# EAGLE board A1000_Board_04 (EAGLE 3.55), part 1 of 8
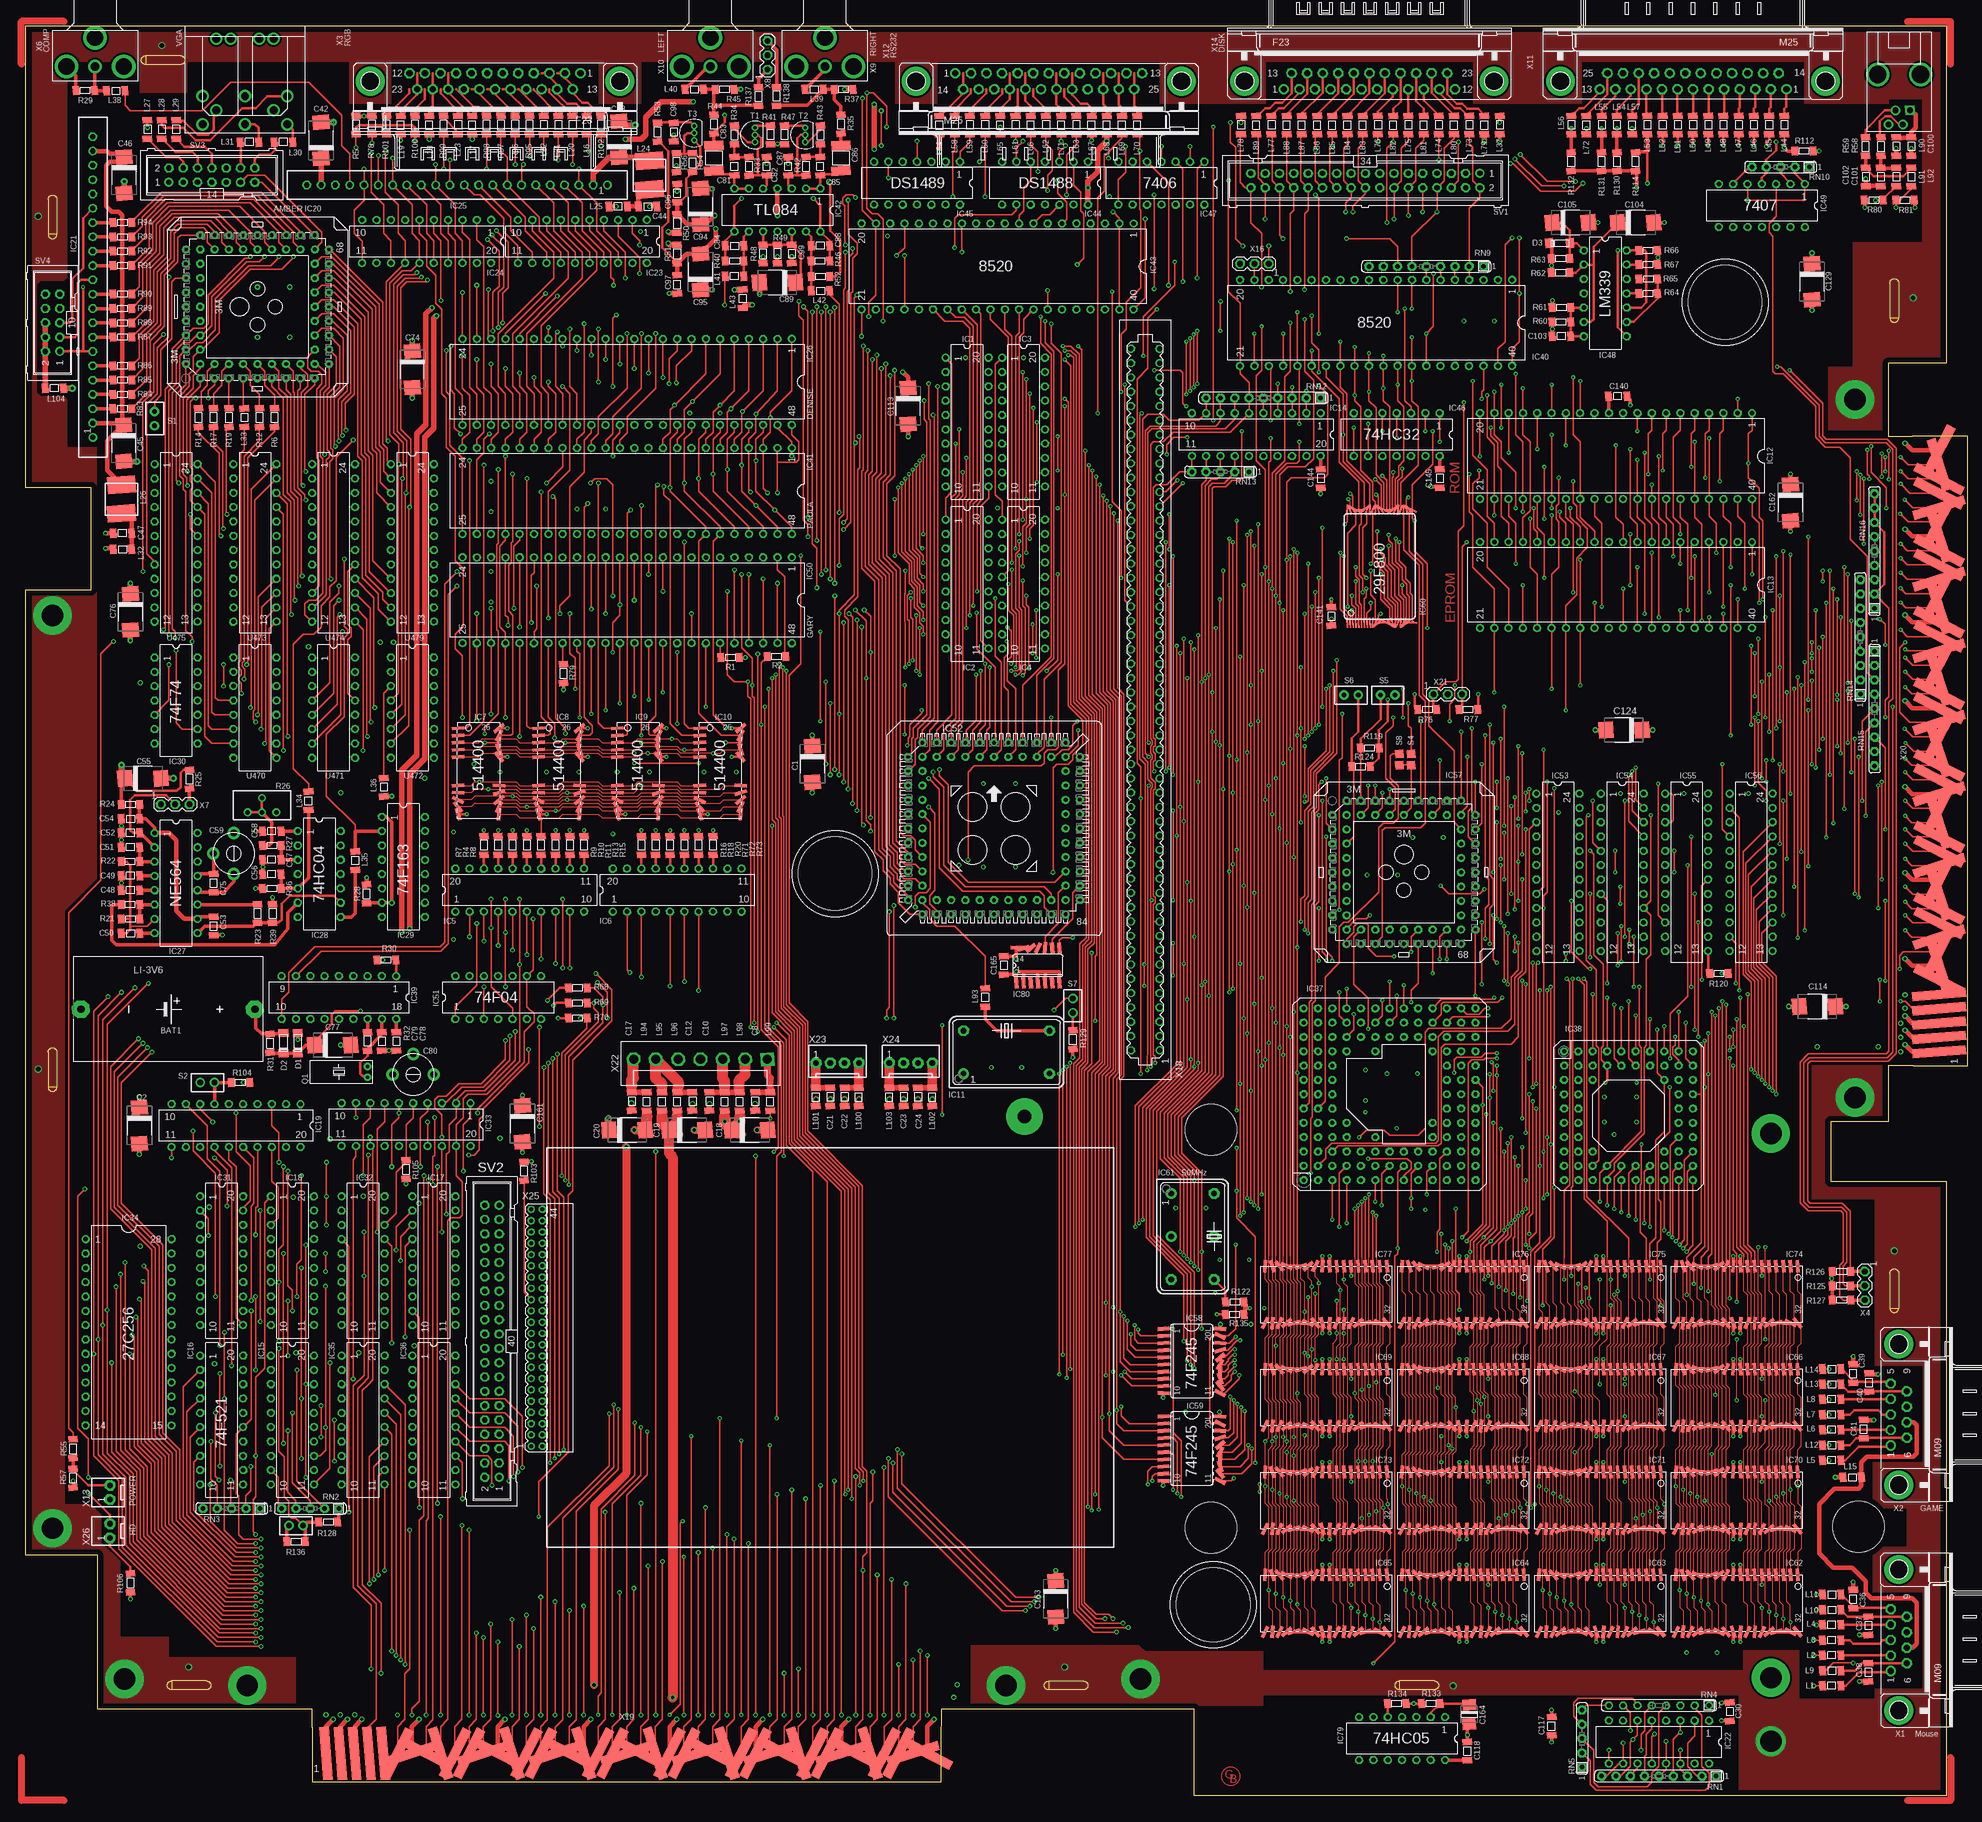
[diagram p0: board, top side]
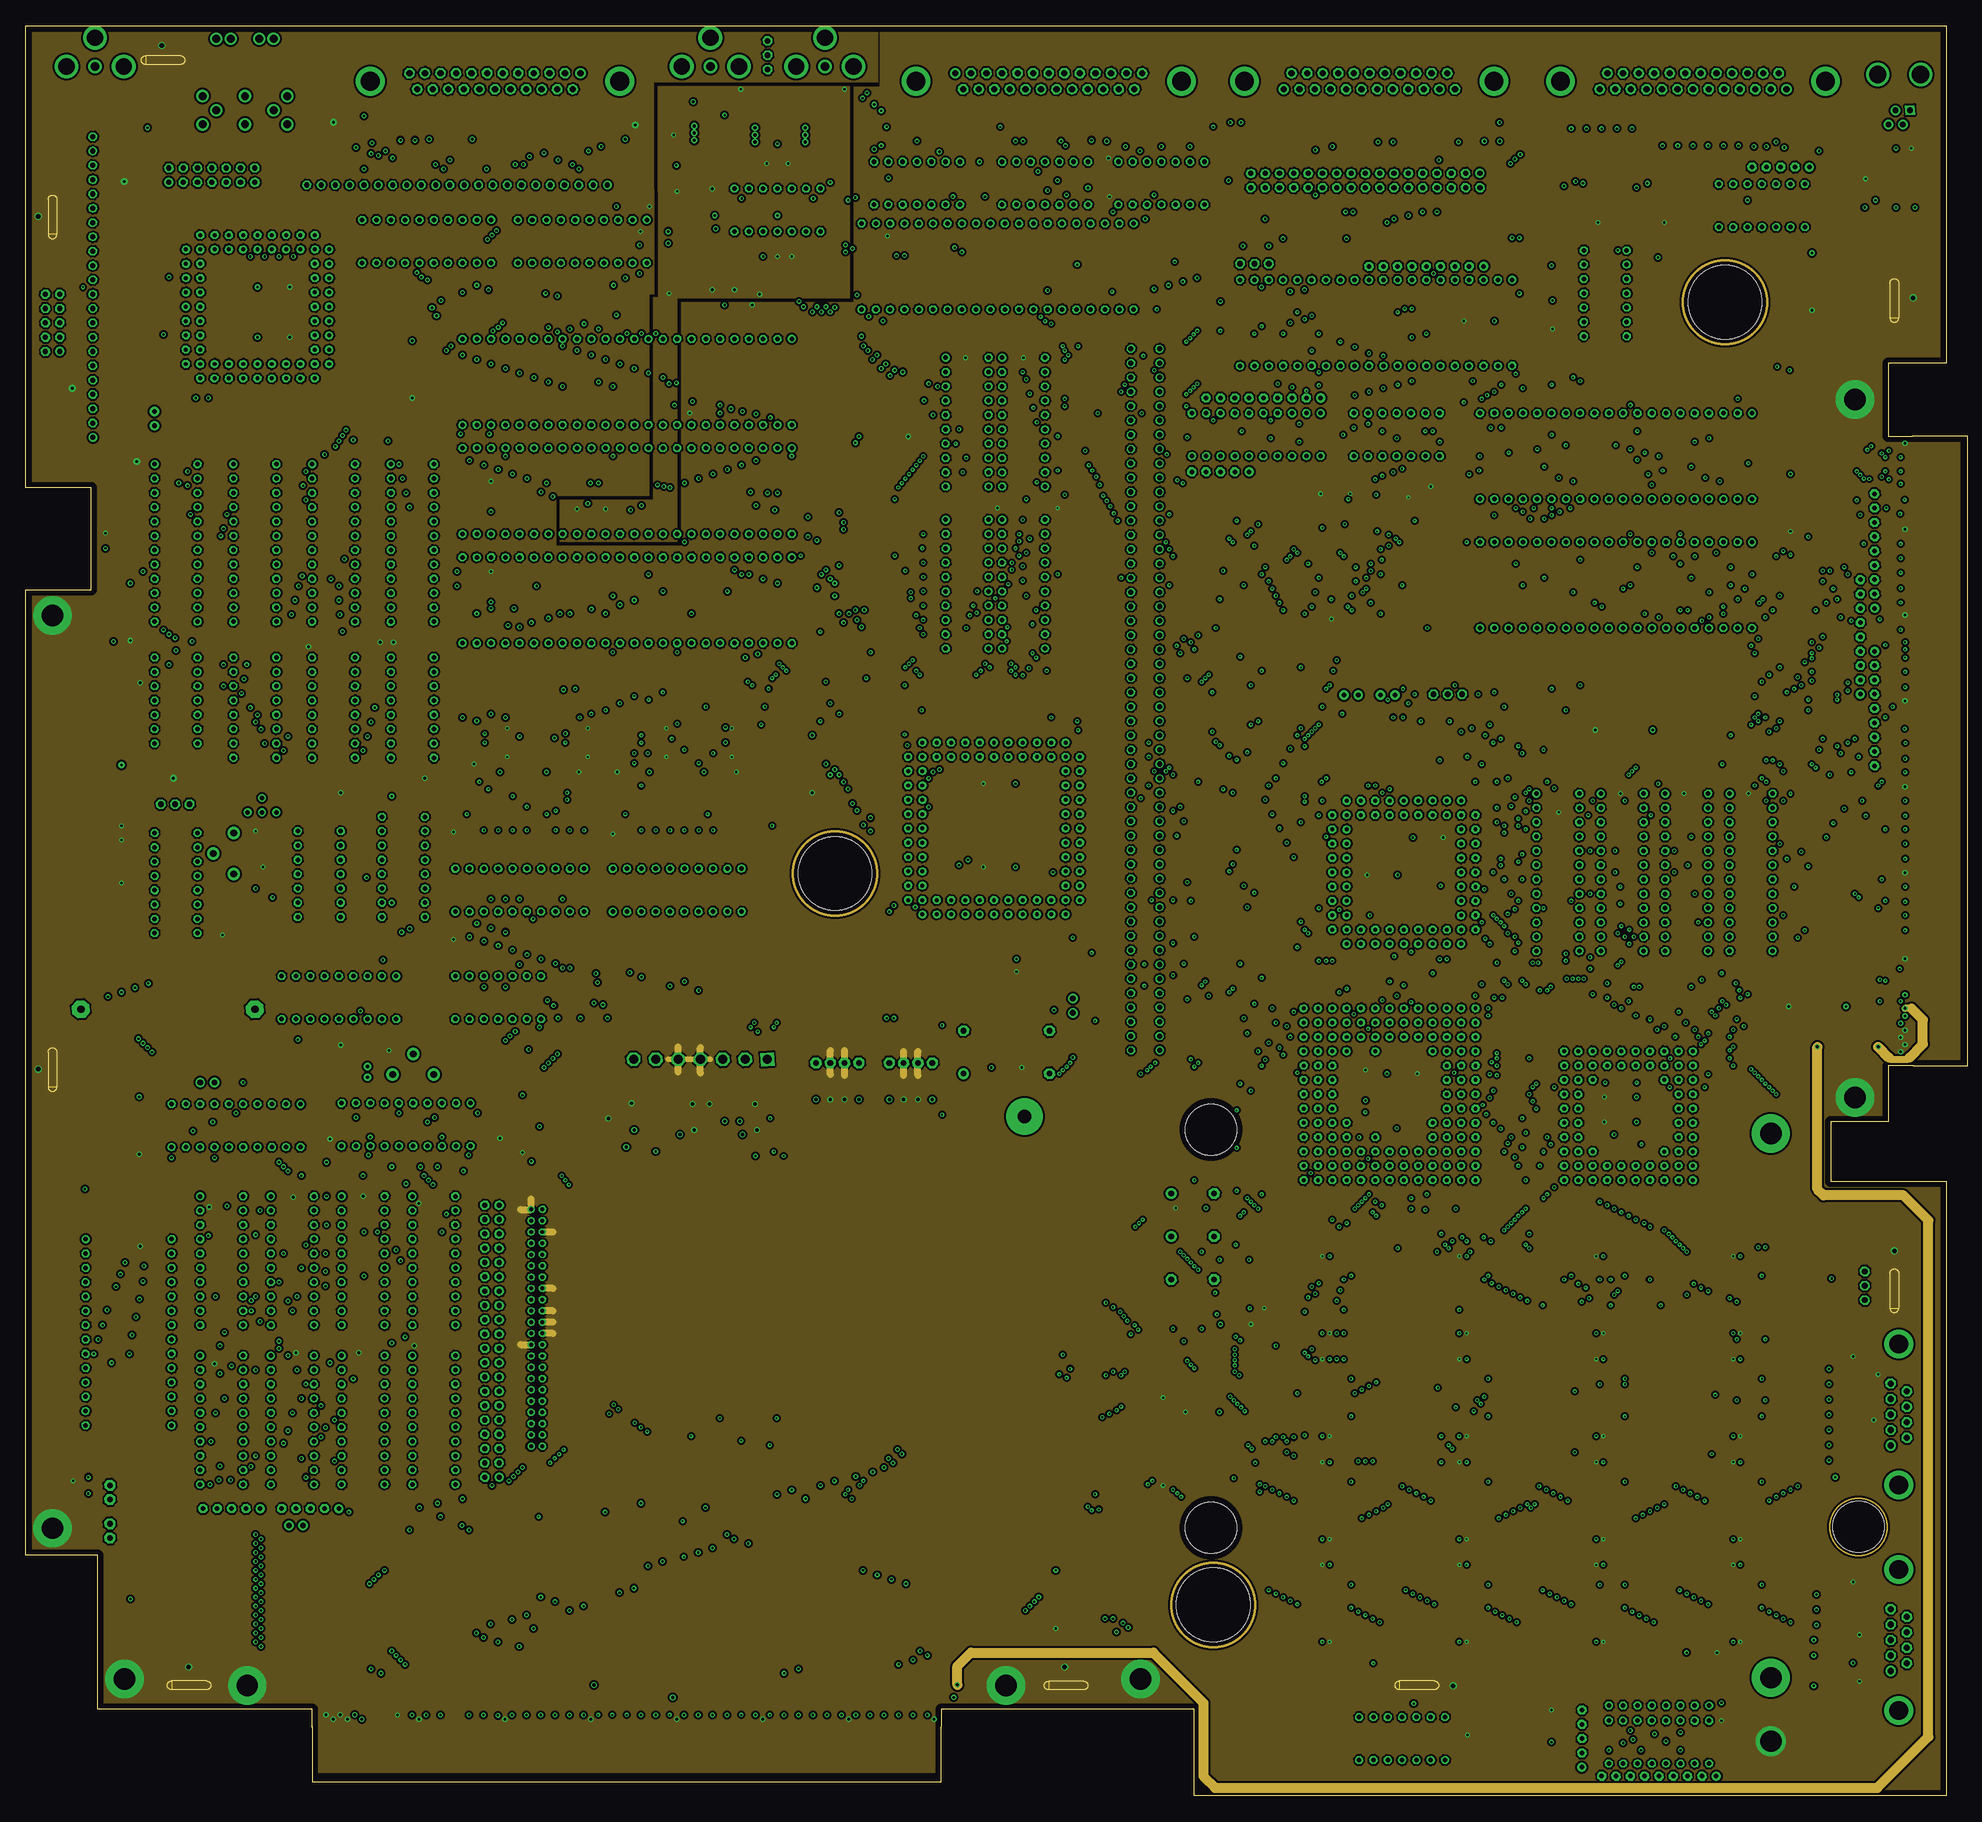
[diagram p1: board, inner layer Route2]
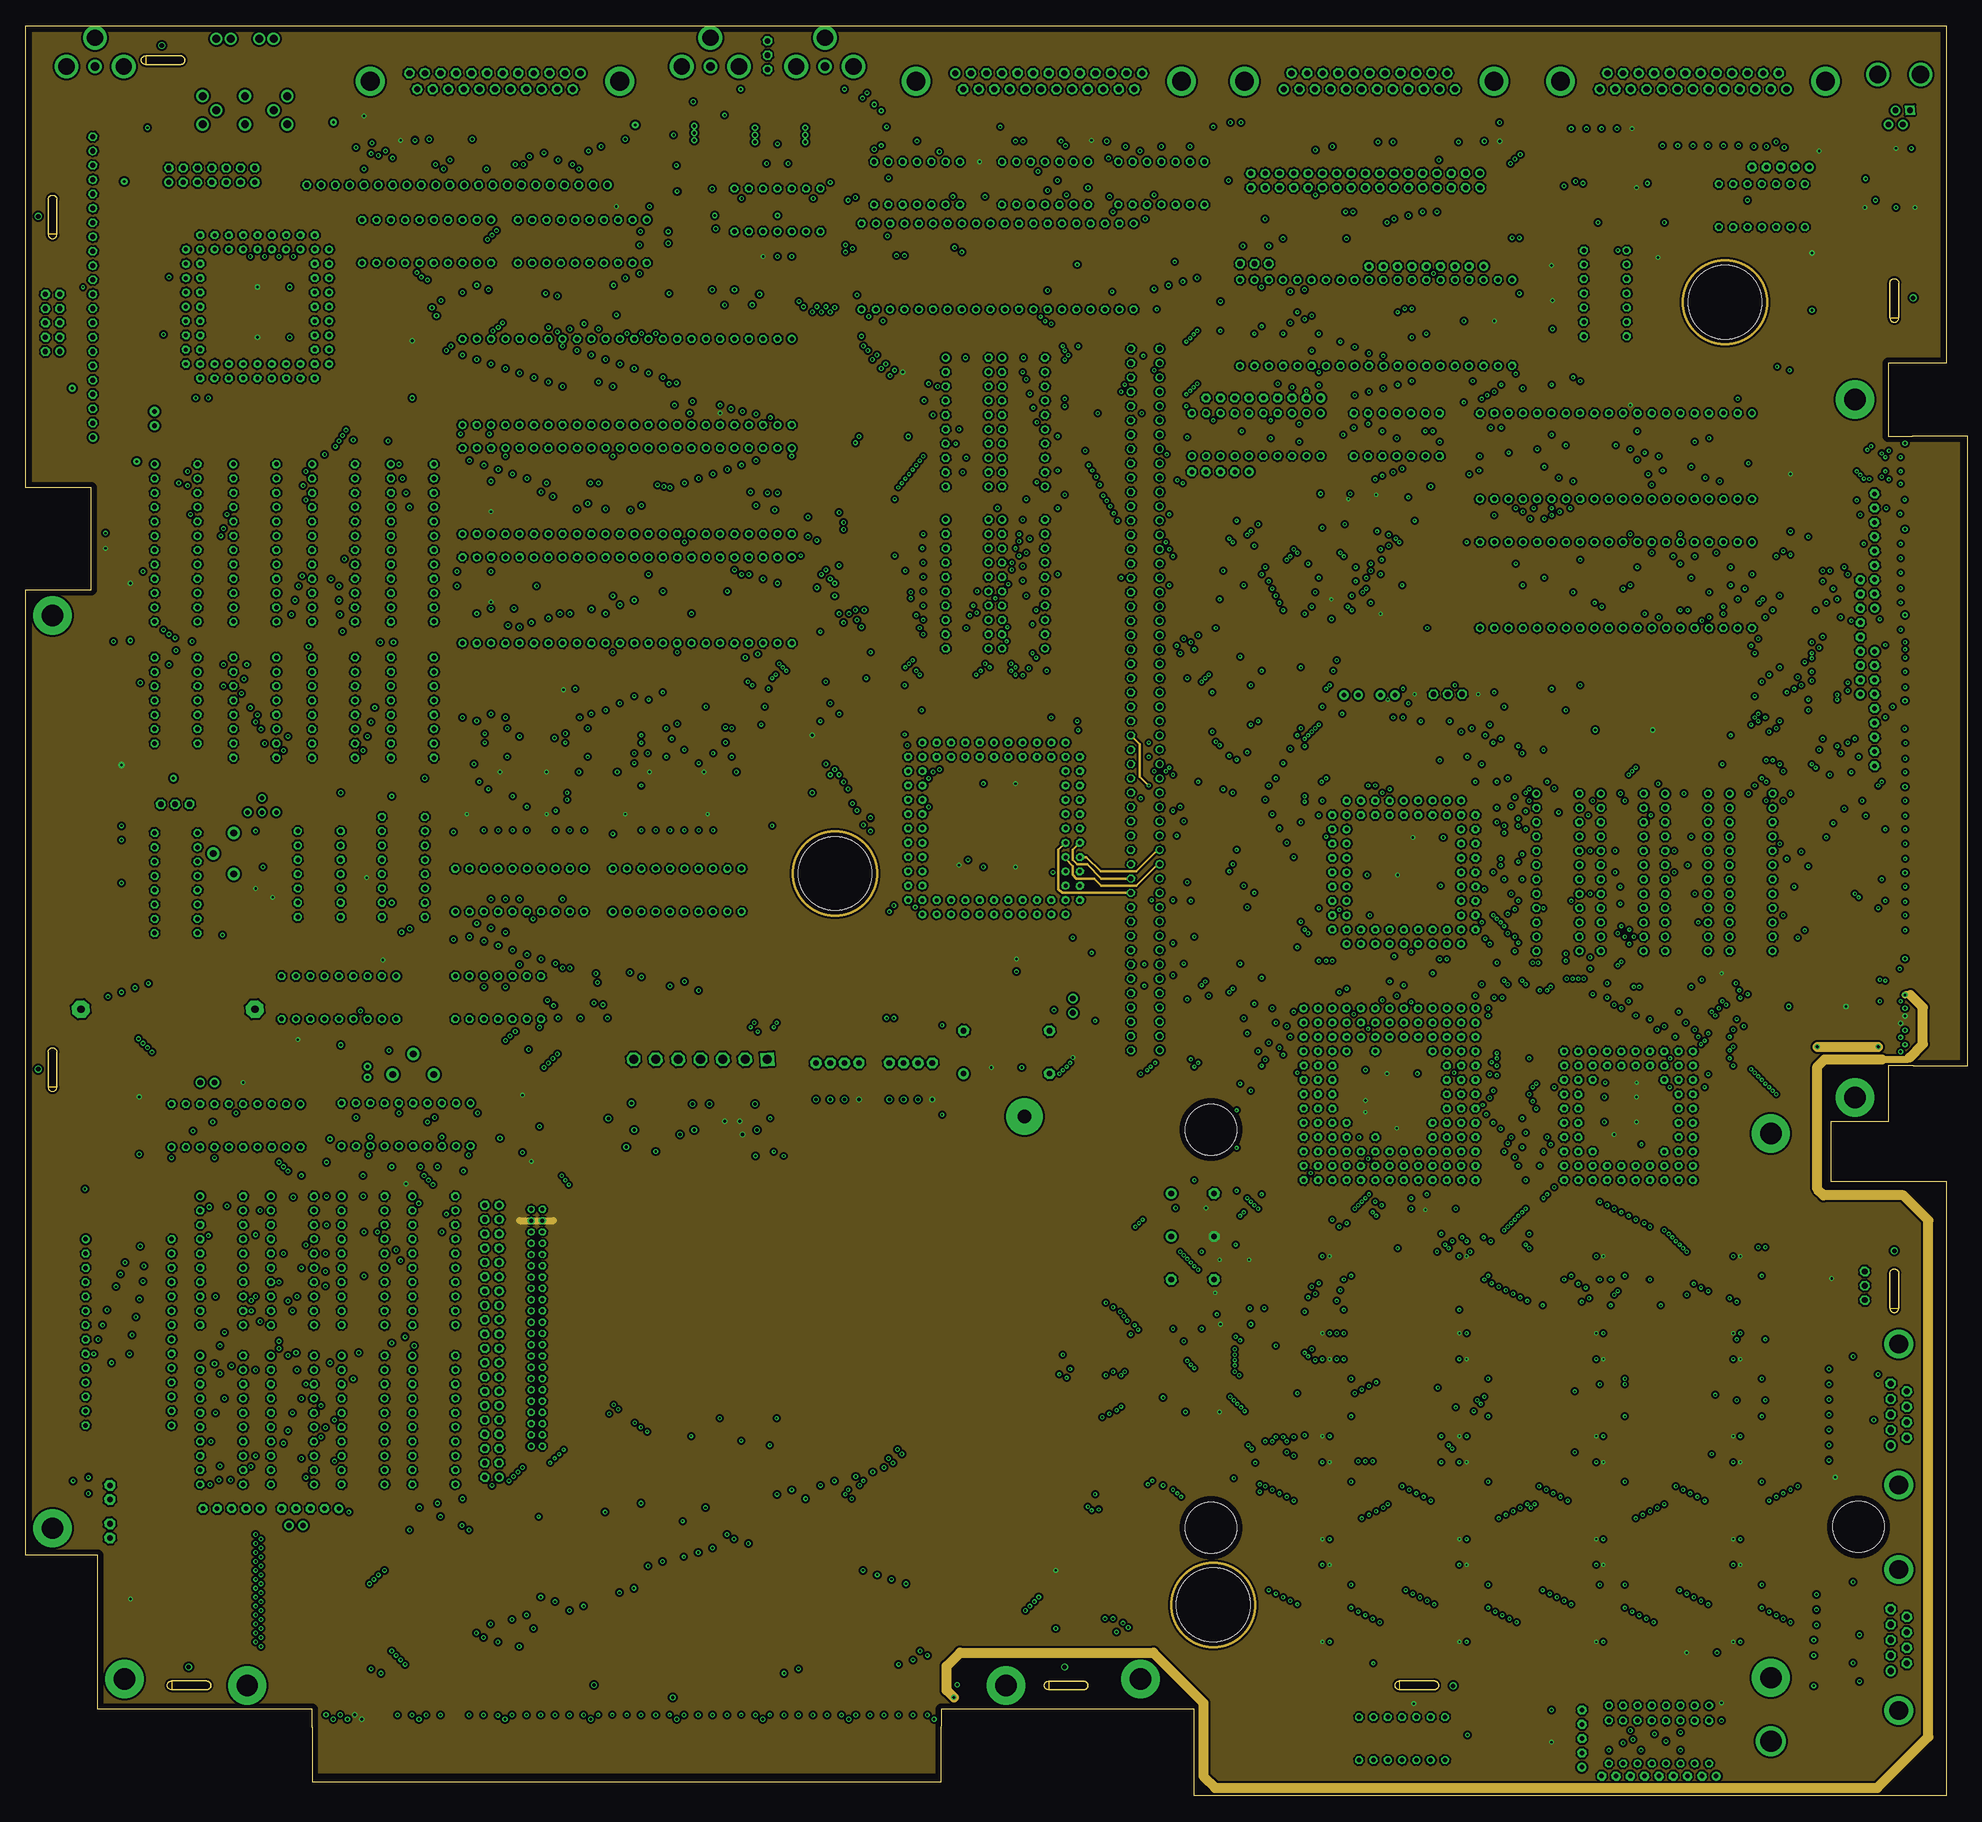
[diagram p2: board, inner layer Route3]
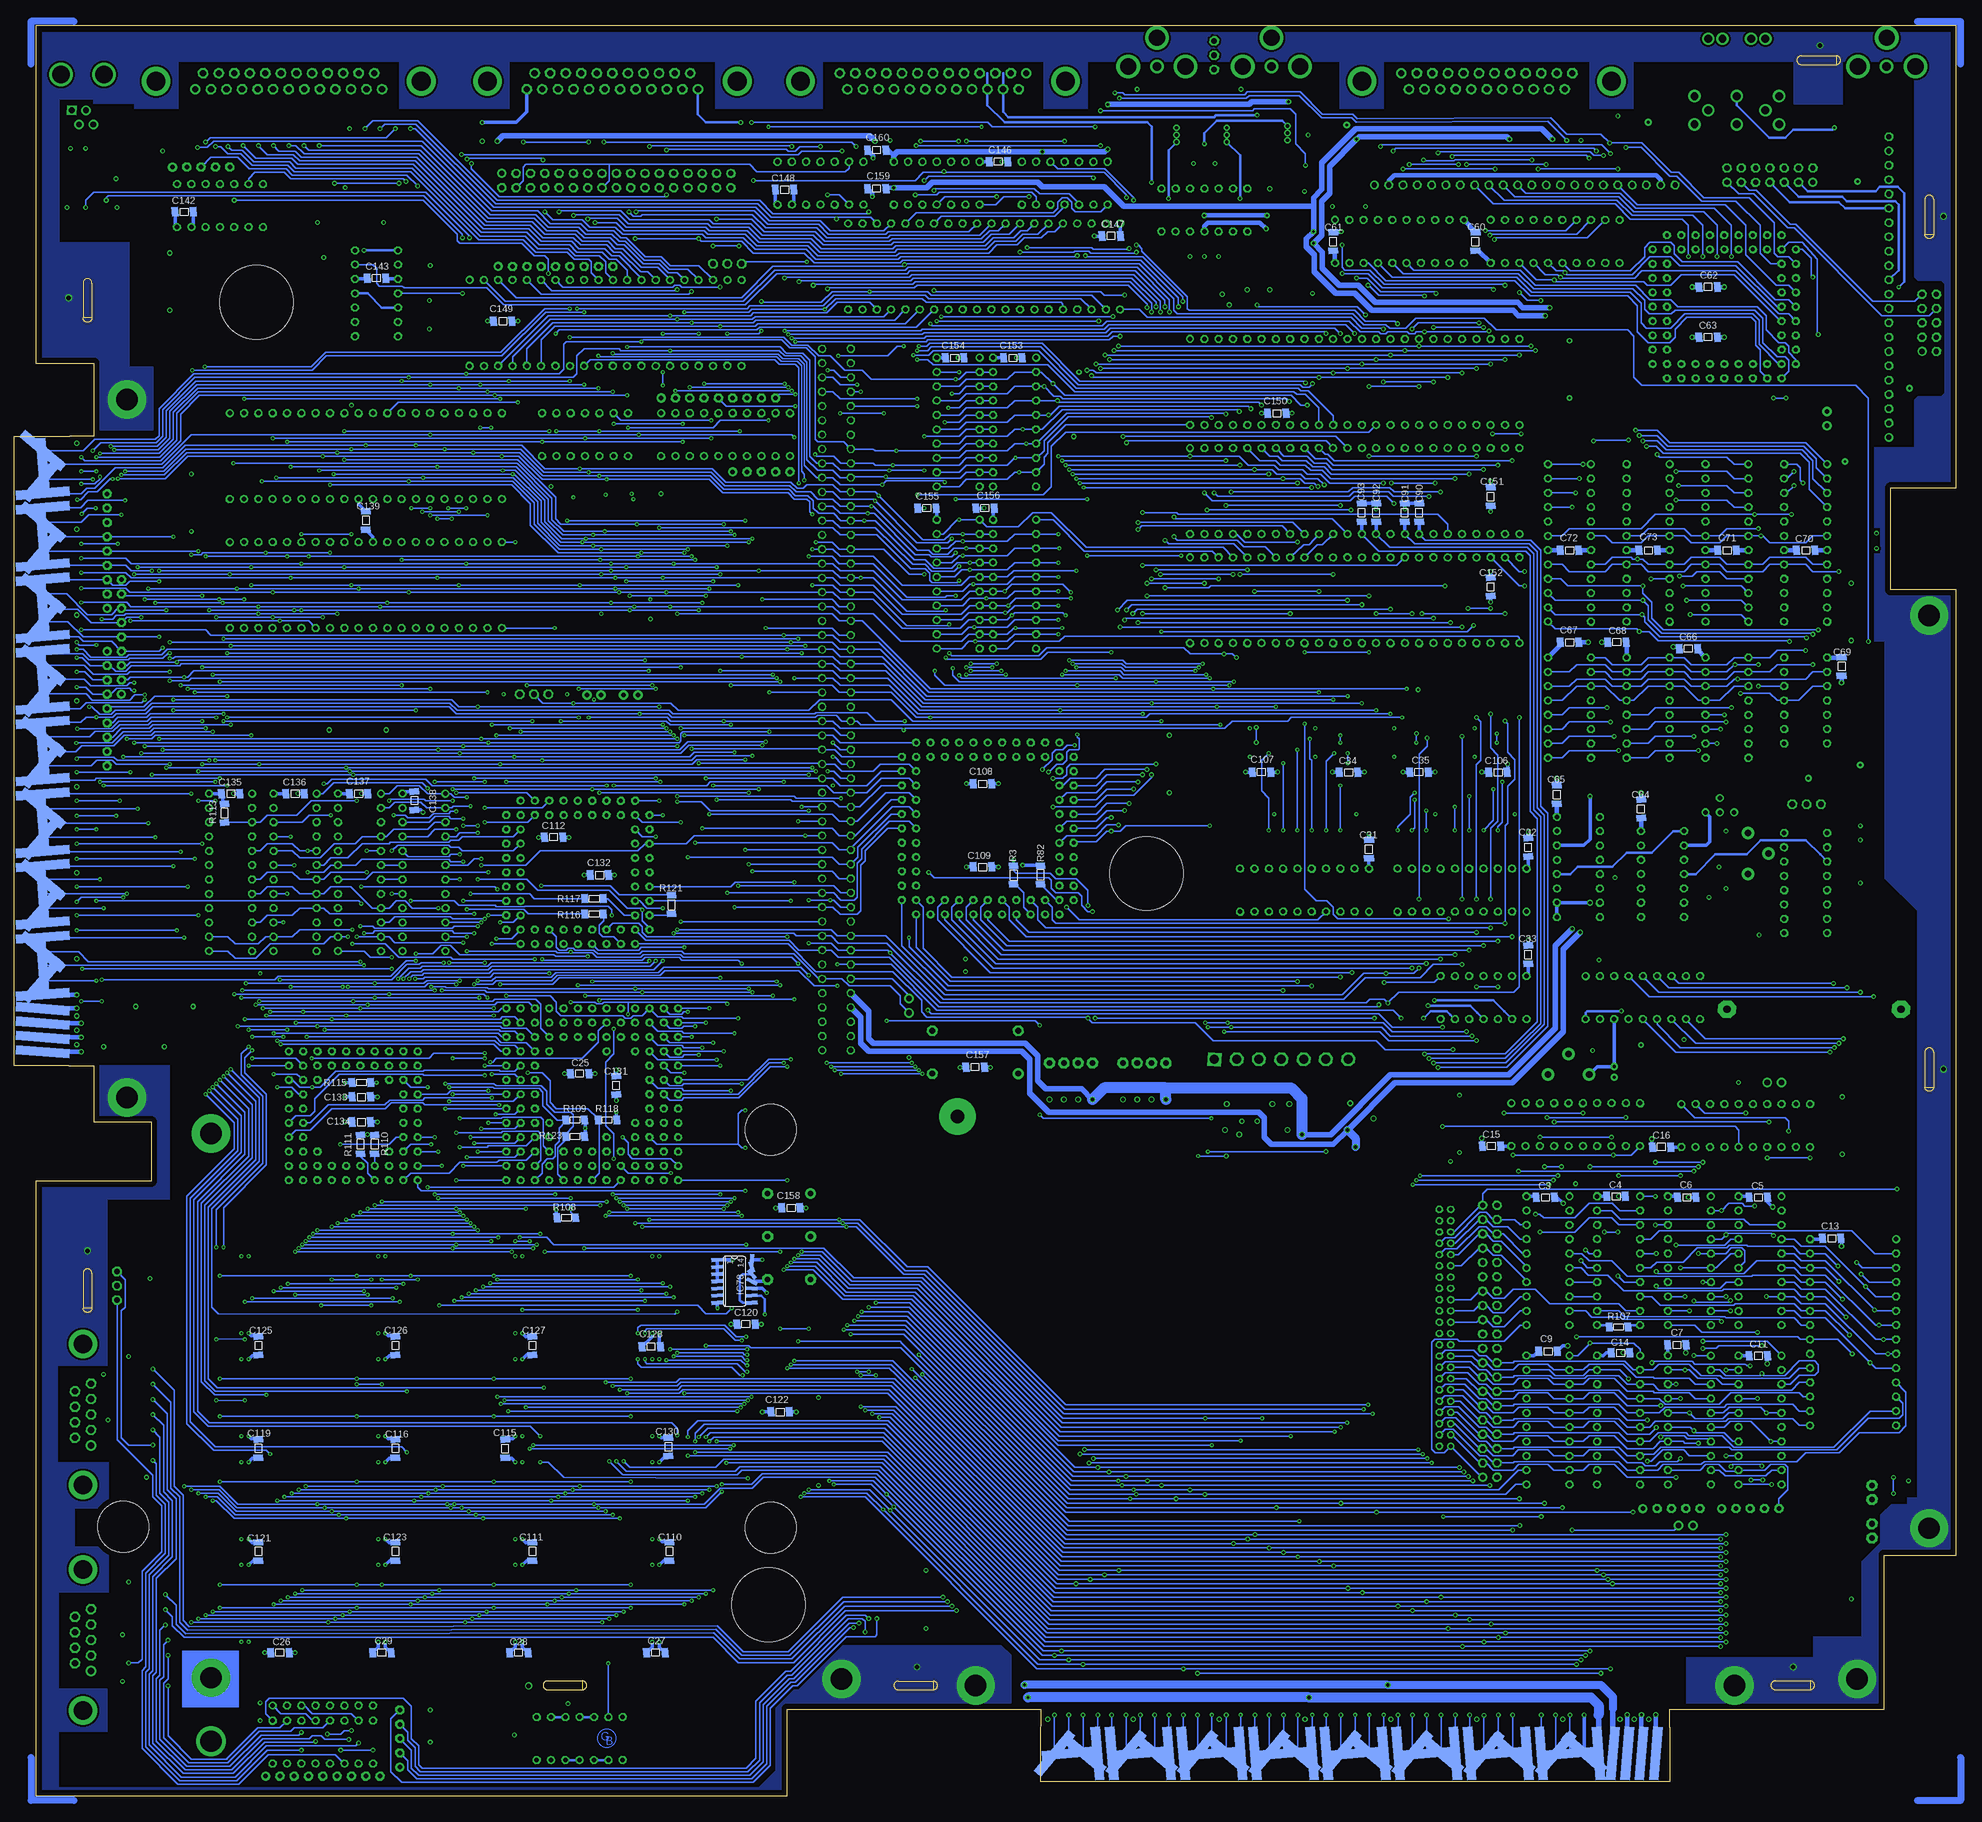
[diagram p3: board, bottom side, seen from below]

Size 344.49 x 314.01 mm. Coordinates in mm from the lower left corner, seen from the top.
Outline: 162.4,12.38 162.4,15.4 207.33,15.4 207.33,0 340.68,0 340.68,109.06 320.2,109.06 320.2,119.54 330.36,119.54 330.36,129.54 334.8,129.54
Outline: 50.8,12.14 50.8,15.4 12.78,15.4 12.78,36.04 12.78,36.04 12.78,42.7 0,42.7 0,157 0,164.31 0,195.1 0,200.98 0,214 11.59,214 11.59,232.09 0,232.09 0,314.01 340.68,314.01 340.68,254.16 330.36,254.16 330.36,241.14 334.65,241.14
Copper layers used: Top, Route2, Route3, Bottom
Holes 9.1 mm at 210.26,47.55 210.26,118.19 325.12,47.7
Holes 13.1 mm at 301.47,264.95 143.59,163.59 210.66,33.89
tRestrict: area 320,42.6 to 330.2,52.8
Milling: 32 lines

## Footprints (pad centres in the part's own frame; a part is rotated, then mirrored left to right if it is on the bottom)
-3V6 = drill 1.321 pad 3.15 octagon:  -15.24,0;  15.621,0
43 = smd 2.6 x 2.9 rotated 4.4:  3.207,0 | smd 2.6 x 2.9 rotated 4.3:  -3.207,0
06 = smd 1.143 x 1.702 rotated 4.4:  1.632,0 | smd 1.143 x 1.702 rotated 4.3:  -1.632,0
TRIM-1 = drill 1.2 pad 2.184 round:  -3.651,0;  3.651,0;  0,3.651
12 = smd 1.71 x 3.4 rotated 4.4:  2.235,0 | smd 1.71 x 3.4 rotated 4.3:  -2.235,0
28 = smd 2.007 x 2.388 rotated 4.4:  1.702,0 | smd 2.007 x 2.388 rotated 4.3:  -1.702,0
D-80 = smd 1.429 x 1.746 rotated 4.4:  -1.832,0 | smd 1.429 x 1.746 rotated 4.3:  1.826,-0.002
P20 = drill 0.8 pad 1.4 round:  -11.43,-3.81 | drill 0.8 pad 1.4 octagon:  -8.89,-3.81;  -6.35,-3.81;  -3.81,-3.81;  -1.27,-3.81;  1.27,-3.81;  3.81,-3.81;  6.35,-3.81;  8.89,-3.81;  11.43,-3.81;  11.43,3.81;  8.89,3.81;  6.35,3.81;  3.81,3.81;  1.27,3.81;  -1.27,3.81;  -3.81,3.81;  -6.35,3.81;  -8.89,3.81;  -11.43,3.81
J26/20 = smd 0.6 x 2.2 rotated 139.4:  -6.35,3.632 | smd 0.6 x 2.2 rotated 116.9:  -5.08,3.632 | smd 0.6 x 2.2 rotated 94.4:  -3.81,3.632 | smd 0.6 x 2.2 rotated 71.9:  -2.54,3.632 | smd 0.6 x 2.2 rotated 49.4:  -1.27,3.632 | smd 0.6 x 2.2 rotated 116.8:  7.62,3.632 | smd 0.6 x 2.2 rotated 139.3:  6.35,3.632 | smd 0.6 x 2.2 rotated 161.8:  5.08,3.632 | smd 0.6 x 2.2 rotated 184.3:  3.81,3.632 | smd 0.6 x 2.2 rotated 49.3:  7.62,-3.632 | smd 0.6 x 2.2 rotated 26.8:  6.35,-3.632 | smd 0.6 x 2.2 rotated 4.3:  5.08,-3.632;  -6.35,-3.632 | smd 0.6 x 2.2 rotated 5:  3.81,-3.632 | smd 0.6 x 2.2 rotated 4.7:  -1.27,-3.632 | smd 0.6 x 2.2 rotated 4.6:  -2.54,-3.632 | smd 0.6 x 2.2 rotated 4.5:  -3.81,-3.632 | smd 0.6 x 2.2 rotated 4.4:  -5.08,-3.632 | smd 0.6 x 2.2 rotated 94.3:  8.89,3.632 | smd 0.6 x 2.2 rotated 71.8:  8.89,-3.632
DIL14 = drill 1 pad 1.905 round:  -7.62,-3.81 | drill 1 pad 1.905 octagon:  7.62,-3.81;  7.62,3.81;  -7.62,3.81
P40-6 = drill 0.8 pad 1.4 round:  -24.13,-7.62 | drill 0.8 pad 1.4 octagon:  -21.59,-7.62;  -19.05,-7.62;  -16.51,-7.62;  -13.97,-7.62;  -11.43,-7.62;  -8.89,-7.62;  -6.35,-7.62;  -3.81,-7.62;  -1.27,-7.62;  1.27,-7.62;  3.81,-7.62;  6.35,-7.62;  8.89,-7.62;  11.43,-7.62;  13.97,-7.62;  16.51,-7.62;  19.05,-7.62;  21.59,-7.62;  24.13,-7.62;  24.13,7.62;  21.59,7.62;  19.05,7.62;  16.51,7.62;  13.97,7.62;  11.43,7.62;  8.89,7.62;  6.35,7.62;  3.81,7.62;  1.27,7.62;  -1.27,7.62;  -3.81,7.62;  -6.35,7.62;  -8.89,7.62;  -11.43,7.62;  -13.97,7.62;  -16.51,7.62;  -19.05,7.62;  -21.59,7.62;  -24.13,7.62
CC68 = drill 0.7 pad 1.4 round:  0,12.7 | drill 0.7 pad 1.4 octagon:  0,10.16;  -2.54,12.7;  -2.54,10.16;  -5.08,12.7;  -5.08,10.16;  -7.62,12.7;  -7.62,10.16;  -10.16,12.7;  -12.7,10.16;  -10.16,10.16;  -12.7,7.62;  -10.16,7.62;  -12.7,5.08;  -10.16,5.08;  -12.7,2.54;  -10.16,2.54;  -12.7,0;  -10.16,0;  -12.7,-2.54;  -10.16,-2.54;  -12.7,-5.08;  -10.16,-5.08;  -12.7,-7.62;  -10.16,-7.62;  -12.7,-10.16;  -10.16,-12.7;  -10.16,-10.16;  -7.62,-12.7;  -7.62,-10.16;  -5.08,-12.7;  -5.08,-10.16;  -2.54,-12.7;  -2.54,-10.16;  0,-12.7;  0,-10.16;  2.54,-12.7;  2.54,-10.16;  5.08,-12.7;  5.08,-10.16;  7.62,-12.7;  7.62,-10.16;  10.16,-12.7;  12.7,-10.16;  10.16,-10.16;  12.7,-7.62;  10.16,-7.62;  12.7,-5.08;  10.16,-5.08;  12.7,-2.54;  10.16,-2.54;  12.7,0;  10.16,0;  12.7,2.54;  10.16,2.54;  12.7,5.08;  10.16,5.08;  12.7,7.62;  10.16,7.62;  12.7,10.16;  10.16,12.7;  10.16,10.16;  7.62,12.7;  7.62,10.16;  5.08,12.7;  5.08,10.16;  2.54,12.7;  2.54,10.16
P22 = drill 0.9 pad 1.5 round:  -26.67,0 | drill 0.9 pad 1.5 octagon:  -24.13,0;  -21.59,0;  -19.05,0;  -16.51,0;  -13.97,0;  -11.43,0;  -8.89,0;  -6.35,0;  -3.81,0;  -1.27,0;  1.27,0;  3.81,0;  6.35,0;  8.89,0;  11.43,0;  13.97,0;  16.51,0;  19.05,0;  21.59,0;  24.13,0;  26.67,0
P16 = drill 0.8 pad 1.4 octagon:  -8.89,-3.81;  -6.35,-3.81;  -3.81,-3.81;  -1.27,-3.81;  1.27,-3.81;  3.81,-3.81;  6.35,-3.81;  8.89,-3.81;  8.89,3.81;  6.35,3.81;  3.81,3.81;  1.27,3.81;  -1.27,3.81;  -3.81,3.81;  -6.35,3.81;  -8.89,3.81
P48-6 = drill 0.8 pad 1.4 round:  -27.94,-7.62 | drill 0.8 pad 1.4 octagon:  -25.4,-7.62;  -22.86,-7.62;  -20.32,-7.62;  -17.78,-7.62;  -15.24,-7.62;  -12.7,-7.62;  -10.16,-7.62;  -7.62,-7.62;  -5.08,-7.62;  -2.54,-7.62;  0,-7.62;  2.54,-7.62;  5.08,-7.62;  7.62,-7.62;  10.16,-7.62;  12.7,-7.62;  15.24,-7.62;  17.78,-7.62;  20.32,-7.62;  22.86,-7.62;  25.4,-7.62;  27.94,-7.62;  30.48,-7.62;  30.48,7.62;  27.94,7.62;  25.4,7.62;  22.86,7.62;  20.32,7.62;  17.78,7.62;  15.24,7.62;  12.7,7.62;  10.16,7.62;  7.62,7.62;  5.08,7.62;  2.54,7.62;  0,7.62;  -2.54,7.62;  -5.08,7.62;  -7.62,7.62;  -10.16,7.62;  -12.7,7.62;  -15.24,7.62;  -17.78,7.62;  -20.32,7.62;  -22.86,7.62;  -25.4,7.62;  -27.94,7.62
P14 = drill 0.8 pad 1.4 octagon:  -7.62,-3.81;  -5.08,-3.81;  -2.54,-3.81;  0,-3.81;  2.54,-3.81;  5.08,-3.81;  7.62,-3.81;  7.62,3.81;  5.08,3.81;  2.54,3.81;  0,3.81;  -2.54,3.81;  -5.08,3.81;  -7.62,3.81
P28-6 = drill 0.8 pad 1.4 round:  -16.51,-7.62 | drill 0.8 pad 1.4 octagon:  -13.97,-7.62;  -11.43,-7.62;  -8.89,-7.62;  -6.35,-7.62;  -3.81,-7.62;  -1.27,-7.62;  1.27,-7.62;  3.81,-7.62;  6.35,-7.62;  8.89,-7.62;  11.43,-7.62;  13.97,-7.62;  16.51,-7.62;  16.51,7.62;  13.97,7.62;  11.43,7.62;  8.89,7.62;  6.35,7.62;  3.81,7.62;  1.27,7.62;  -1.27,7.62;  -3.81,7.62;  -6.35,7.62;  -8.89,7.62;  -11.43,7.62;  -13.97,7.62;  -16.51,7.62
A-128 = drill 0.7 pad 1.4 octagon:  15.24,-15.24;  12.7,-15.24;  10.16,-15.24;  7.62,-15.24;  5.08,-15.24;  2.54,-15.24;  0,-15.24;  -2.54,-15.24;  -5.08,-15.24;  -7.62,-15.24;  -10.16,-15.24;  -12.7,-15.24;  -15.24,-15.24;  -15.24,-12.7;  15.24,12.7;  15.24,10.16;  15.24,7.62;  15.24,5.08;  15.24,2.54;  15.24,0;  15.24,-2.54;  15.24,-5.08;  15.24,-7.62;  15.24,-12.7;  12.7,-12.7;  10.16,-12.7;  7.62,-12.7;  5.08,-12.7;  2.54,-12.7;  0,-12.7;  -2.54,-12.7;  -5.08,-12.7;  -7.62,-12.7;  -10.16,-12.7;  -12.7,-12.7;  -15.24,-7.62;  -15.24,-5.08;  -15.24,-2.54;  -15.24,0;  -15.24,2.54;  -15.24,5.08;  -15.24,7.62;  -15.24,10.16;  -15.24,12.7;  12.7,12.7;  12.7,10.16;  12.7,7.62;  12.7,5.08;  12.7,2.54;  12.7,0;  12.7,-2.54;  12.7,-5.08;  12.7,-7.62;  12.7,15.24;  -15.24,15.24;  -12.7,15.24;  -10.16,15.24;  -7.62,15.24;  -5.08,15.24;  -2.54,15.24;  0,15.24;  2.54,15.24;  5.08,15.24;  7.62,15.24;  10.16,15.24;  -15.24,-10.16;  15.24,-10.16;  -12.7,-10.16;  -10.16,-10.16;  -7.62,-10.16;  -5.08,-10.16;  -2.54,-10.16;  0,-10.16;  2.54,-10.16;  5.08,-10.16;  7.62,-10.16;  10.16,-10.16;  12.7,-10.16;  15.24,15.24;  10.16,12.7;  10.16,10.16;  10.16,7.62;  10.16,5.08;  10.16,2.54;  10.16,0;  10.16,-2.54;  10.16,-5.08;  10.16,-7.62;  -12.7,12.7;  -12.7,10.16;  -12.7,7.62;  -12.7,5.08;  -12.7,2.54;  -12.7,0;  -12.7,-2.54;  -12.7,-5.08;  -12.7,-7.62;  7.62,12.7;  5.08,12.7;  2.54,12.7;  0,12.7;  -2.54,12.7;  -5.08,12.7;  -7.62,12.7;  -10.16,12.7;  -10.16,10.16;  -7.62,10.16;  -5.08,10.16;  -2.54,10.16;  0,10.16;  2.54,10.16;  5.08,10.16;  7.62,10.16;  -10.16,0;  -10.16,7.62;  -10.16,5.08;  -10.16,2.54;  -10.16,-2.54;  -10.16,-5.08;  -10.16,-7.62;  -7.62,-7.62;  -7.62,7.62;  7.62,7.62;  7.62,-7.62;  5.08,-7.62;  -7.62,-2.54;  5.08,7.62;  7.62,-2.54
A-68 = drill 0.7 pad 1.397 octagon:  1.27,-11.43;  1.27,-8.89;  3.81,-11.43;  3.81,-8.89;  6.35,-11.43;  6.35,-8.89;  8.89,-11.43;  8.89,-8.89;  11.43,-11.43;  11.43,6.35;  11.43,-8.89;  11.43,-6.35;  8.89,-6.35;  6.35,6.35;  6.35,-6.35;  11.43,-3.81;  8.89,-3.81;  11.43,-1.27;  8.89,-1.27;  11.43,1.27;  8.89,1.27;  11.43,3.81;  8.89,3.81;  -11.43,-11.43;  8.89,6.35;  -11.43,8.89;  11.43,11.43;  11.43,8.89;  8.89,11.43;  8.89,8.89;  6.35,11.43;  6.35,8.89;  3.81,11.43;  3.81,8.89;  1.27,11.43;  1.27,8.89;  -1.27,11.43;  -1.27,8.89;  -3.81,11.43;  -3.81,8.89;  -6.35,11.43;  -6.35,8.89;  -8.89,11.43;  -11.43,11.43;  -8.89,8.89;  -11.43,6.35;  -8.89,6.35;  -11.43,3.81;  -8.89,3.81;  -11.43,1.27;  -8.89,1.27;  -11.43,-1.27;  -8.89,-1.27;  -11.43,-3.81;  -8.89,-3.81;  -6.35,6.35;  -6.35,-6.35;  -11.43,-6.35;  -8.89,-6.35;  -11.43,-8.89;  -8.89,-11.43;  -8.89,-8.89;  -6.35,-11.43;  -6.35,-8.89;  -3.81,-11.43;  -3.81,-8.89;  -1.27,-11.43;  -1.27,-8.89
P18 = drill 0.8 pad 1.4 round:  -10.16,-3.81 | drill 0.8 pad 1.4 octagon:  -7.62,-3.81;  -5.08,-3.81;  -2.54,-3.81;  0,-3.81;  2.54,-3.81;  5.08,-3.81;  7.62,-3.81;  10.16,-3.81;  10.16,3.81;  7.62,3.81;  5.08,3.81;  2.54,3.81;  0,3.81;  -2.54,3.81;  -5.08,3.81;  -7.62,3.81;  -10.16,3.81
CC84 = drill 0.7 pad 1.4 round:  0,15.24 | drill 0.7 pad 1.4 octagon:  0,12.7;  -2.54,15.24;  -2.54,12.7;  -5.08,15.24;  -5.08,12.7;  -7.62,15.24;  -7.62,12.7;  -10.16,15.24;  -10.16,12.7;  -12.7,15.24;  -15.24,12.7;  -12.7,12.7;  -15.24,10.16;  -12.7,10.16;  -15.24,7.62;  -12.7,7.62;  -15.24,5.08;  -12.7,5.08;  -15.24,2.54;  -12.7,2.54;  -15.24,0;  -12.7,0;  -15.24,-2.54;  -12.7,-2.54;  -15.24,-5.08;  -12.7,-5.08;  -15.24,-7.62;  -12.7,-7.62;  -15.24,-10.16;  -15.24,-12.7;  -12.7,-10.16;  -12.7,-15.24;  -12.7,-12.7;  -10.16,-12.7;  -10.16,-15.24;  -7.62,-12.7;  -7.62,-15.24;  -5.08,-12.7;  -5.08,-15.24;  -2.54,-15.24;  -2.54,-12.7;  0,-15.24;  0,-12.7;  2.54,-15.24;  2.54,-12.7;  5.08,-15.24;  5.08,-12.7;  7.62,-12.7;  7.62,-15.24;  10.16,-12.7;  10.16,-15.24;  12.7,-15.24;  12.7,12.7;  15.24,12.7;  12.7,10.16;  15.24,10.16;  12.7,7.62;  15.24,7.62;  12.7,5.08;  15.24,5.08;  12.7,2.54;  15.24,2.54;  12.7,0;  15.24,0;  12.7,-2.54;  15.24,-2.54;  12.7,-5.08;  15.24,-5.08;  12.7,-7.62;  15.24,-7.62;  12.7,-10.16;  12.7,-12.7;  15.24,-10.16;  15.24,-12.7;  5.08,12.7;  5.08,15.24;  7.62,12.7;  7.62,15.24;  10.16,12.7;  10.16,15.24;  12.7,15.24;  2.54,15.24;  2.54,12.7
P24-3 = drill 0.8 pad 1.4 round:  -13.97,-3.81 | drill 0.8 pad 1.4 octagon:  -11.43,-3.81;  -8.89,-3.81;  -6.35,-3.81;  -3.81,-3.81;  -1.27,-3.81;  1.27,-3.81;  3.81,-3.81;  6.35,-3.81;  8.89,-3.81;  11.43,-3.81;  13.97,-3.81;  13.97,3.81;  11.43,3.81;  8.89,3.81;  6.35,3.81;  3.81,3.81;  1.27,3.81;  -1.27,3.81;  -3.81,3.81;  -6.35,3.81;  -8.89,3.81;  -11.43,3.81;  -13.97,3.81
20L = smd 0.66 x 2.032 rotated 4.3:  -5.715,-5.029;  5.715,-5.029 | smd 0.66 x 2.032 rotated 4.4:  -4.445,-5.029;  -5.715,5.029 | smd 0.66 x 2.032 rotated 4.5:  -3.175,-5.029 | smd 0.66 x 2.032 rotated 4.6:  -1.905,-5.029 | smd 0.66 x 2.032 rotated 4.7:  -0.635,-5.029;  0.635,-5.029 | smd 0.66 x 2.032 rotated 4.8:  1.905,-5.029 | smd 0.66 x 2.032 rotated 4.9:  3.175,-5.029 | smd 0.66 x 2.032 rotated 71.8:  3.175,5.029 | smd 0.66 x 2.032 rotated 94.3:  1.905,5.029 | smd 0.66 x 2.032 rotated 116.8:  0.635,5.029 | smd 0.66 x 2.032 rotated 139.3:  -0.635,5.029 | smd 0.66 x 2.032 rotated 161.8:  -1.905,5.029 | smd 0.66 x 2.032 rotated 184.3:  -3.175,5.029 | smd 0.66 x 2.032 rotated 206.8:  -4.445,5.029 | smd 0.66 x 2.032 rotated 5:  4.445,-5.029 | smd 0.66 x 2.032 rotated 49.3:  4.445,5.029 | smd 0.66 x 2.032 rotated 26.8:  5.715,5.029
OP48 = smd 1.778 x 0.254 rotated 116.9:  10.023,-5.738 | smd 1.778 x 0.254 rotated 139.4:  10.023,-5.238 | smd 1.778 x 0.254 rotated 161.9:  10.023,-4.738 | smd 1.778 x 0.254 rotated 184.4:  10.023,-4.238 | smd 1.778 x 0.254 rotated 206.9:  10.023,-3.738 | smd 1.778 x 0.254 rotated 4.5:  10.023,-3.238;  -10.023,4.762 | smd 1.778 x 0.254 rotated 27:  10.023,-2.738 | smd 1.778 x 0.254 rotated 49.5:  10.023,-2.238 | smd 1.778 x 0.254 rotated 72:  10.023,-1.738 | smd 1.778 x 0.254 rotated 94.5:  10.023,-1.238 | smd 1.778 x 0.254 rotated 117:  10.023,-0.738 | smd 1.778 x 0.254 rotated 139.5:  10.023,-0.238 | smd 1.778 x 0.254 rotated 162:  10.023,0.262 | smd 1.778 x 0.254 rotated 184.5:  10.023,0.762 | smd 1.778 x 0.254 rotated 207:  10.023,1.262 | smd 1.778 x 0.254 rotated 4.6:  10.023,1.762;  -10.023,4.262 | smd 1.778 x 0.254 rotated 27.1:  10.023,2.262 | smd 1.778 x 0.254 rotated 49.6:  10.023,2.762 | smd 1.778 x 0.254 rotated 72.1:  10.023,3.262 | smd 1.778 x 0.254 rotated 94.6:  10.023,3.762 | smd 1.778 x 0.254 rotated 117.1:  10.023,4.262 | smd 1.778 x 0.254 rotated 139.6:  10.023,4.762 | smd 1.778 x 0.254 rotated 162.1:  10.023,5.262 | smd 1.778 x 0.254 rotated 184.6:  10.023,5.762 | smd 1.778 x 0.254 rotated 4.3:  -10.023,5.762;  -10.023,1.262 | smd 1.778 x 0.254 rotated 4.4:  -10.023,5.262;  -10.023,-3.738 | smd 1.778 x 0.254 rotated 4.7:  -10.023,3.762;  -10.023,3.262 | smd 1.778 x 0.254 rotated 4.8:  -10.023,2.762 | smd 1.778 x 0.254 rotated 4.9:  -10.023,2.262 | smd 1.778 x 0.254 rotated 5:  -10.023,1.762 | smd 1.778 x 0.254 rotated 26.8:  -10.023,0.762 | smd 1.778 x 0.254 rotated 49.3:  -10.023,0.262 | smd 1.778 x 0.254 rotated 71.8:  -10.023,-0.238 | smd 1.778 x 0.254 rotated 94.3:  -10.023,-0.738 | smd 1.778 x 0.254 rotated 116.8:  -10.023,-1.238 | smd 1.778 x 0.254 rotated 139.3:  -10.023,-1.738 | smd 1.778 x 0.254 rotated 161.8:  -10.023,-2.238 | smd 1.778 x 0.254 rotated 184.3:  -10.023,-2.738 | smd 1.778 x 0.254 rotated 206.8:  -10.023,-3.238 | smd 1.778 x 0.254 rotated 26.9:  -10.023,-4.238 | smd 1.778 x 0.254 rotated 49.4:  -10.023,-4.738 | smd 1.778 x 0.254 rotated 71.9:  -10.023,-5.238 | smd 1.778 x 0.254 rotated 94.4:  -10.023,-5.738
J36/4 = smd 0.6 x 2.2 rotated 49.5:  -5.715,5.029 | smd 0.6 x 2.2 rotated 27:  -4.445,5.029 | smd 0.6 x 2.2 rotated 4.5:  -3.175,5.029;  -8.255,-5.061 | smd 0.6 x 2.2 rotated 206.9:  -1.905,5.029 | smd 0.6 x 2.2 rotated 184.4:  -0.635,5.029 | smd 0.6 x 2.2 rotated 26.9:  8.255,5.029 | smd 0.6 x 2.2 rotated 49.4:  6.985,5.029 | smd 0.6 x 2.2 rotated 71.9:  5.715,5.029 | smd 0.6 x 2.2 rotated 94.4:  4.445,5.029 | smd 0.6 x 2.2 rotated 49.3:  3.175,-5.061 | smd 0.6 x 2.2 rotated 26.8:  1.905,-5.061 | smd 0.6 x 2.2 rotated 4.3:  0.635,-5.061;  -10.795,-5.061 | smd 0.6 x 2.2 rotated 5:  -0.635,-5.061 | smd 0.6 x 2.2 rotated 4.7:  -5.715,-5.061;  -4.445,-5.061 | smd 0.6 x 2.2 rotated 4.6:  -6.985,-5.061 | smd 0.6 x 2.2 rotated 4.4:  -9.525,-5.061;  9.525,5.029 | smd 0.6 x 2.2 rotated 71.8:  4.445,-5.061 | smd 0.6 x 2.2 rotated 161.9:  0.635,5.029 | smd 0.6 x 2.2 rotated 116.9:  3.175,5.029 | smd 0.6 x 2.2 rotated 4.9:  -1.905,-5.061 | smd 0.6 x 2.2 rotated 139.4:  1.905,5.029 | smd 0.6 x 2.2 rotated 4.8:  -3.175,-5.061 | smd 0.6 x 2.2 rotated 94.3:  5.715,-5.061 | smd 0.6 x 2.2 rotated 206.8:  10.795,5.029 | smd 0.6 x 2.2 rotated 116.8:  6.985,-5.061 | smd 0.6 x 2.2 rotated 139.3:  8.255,-5.061 | smd 0.6 x 2.2 rotated 184.3:  10.795,-5.061 | smd 0.6 x 2.2 rotated 161.8:  9.525,-5.061 | smd 0.6 x 2.2 rotated 72:  -6.985,5.029 | smd 0.6 x 2.2 rotated 94.5:  -8.255,5.029 | smd 0.6 x 2.2 rotated 117:  -9.525,5.029 | smd 0.6 x 2.2 rotated 139.5:  -10.795,5.029
14 = smd 0.66 x 2.032 rotated 4.3:  -3.81,-3.073;  1.27,3.073 | smd 0.66 x 2.032 rotated 94.3:  -3.81,3.073 | smd 0.66 x 2.032 rotated 4.4:  -2.54,-3.073 | smd 0.66 x 2.032 rotated 4.5:  -1.27,-3.073 | smd 0.66 x 2.032 rotated 71.8:  -2.54,3.073 | smd 0.66 x 2.032 rotated 49.3:  -1.27,3.073 | smd 0.66 x 2.032 rotated 4.6:  0,-3.073 | smd 0.66 x 2.032 rotated 26.8:  0,3.073 | smd 0.66 x 2.032 rotated 4.7:  1.27,-3.073;  2.54,-3.073 | smd 0.66 x 2.032 rotated 5:  2.54,3.073 | smd 0.66 x 2.032 rotated 4.8:  3.81,-3.073 | smd 0.66 x 2.032 rotated 4.9:  3.81,3.073
10UH = smd 3 x 5 rotated 4.4:  -2.54,-0.013 | smd 3 x 5 rotated 4.3:  2.54,-0.013
UHR = drill 0.6 pad 1.3 round:  0,0.953;  0,-0.953
04 = smd 1.16 x 1.6 rotated 4.4:  1.651,0 | smd 1.16 x 1.6 rotated 4.3:  -1.651,0
POT-G = drill 0.8 pad 1.397 round:  0,-1.27;  -2.54,-1.27;  2.54,-1.27;  0,1.27
L9 = drill 0.8 pad 1.6 round:  -10.16,0 | drill 0.8 pad 1.6 octagon:  -7.62,0;  -5.08,0;  -2.54,0;  0,0;  2.54,0;  5.08,0;  7.62,0;  10.16,0
L5 = drill 0.8 pad 1.6 round:  -5.08,0 | drill 0.8 pad 1.6 octagon:  -2.54,0;  0,0;  2.54,0;  5.08,0
L8 = drill 0.8 pad 1.4 round:  -8.89,0 | drill 0.8 pad 1.4 octagon:  -6.35,0;  -3.81,0;  -1.27,0;  1.27,0;  3.81,0;  6.35,0;  8.89,0
MPER = drill 0.8 pad 1.676 round:  -1.27,0;  1.27,0
UECK-S = drill 1 pad 1.676 round:  -1.27,0;  1.27,0
UECKE = smd 1.5 x 1.5 rotated 4.4:  0.997,0 | smd 1.5 x 1.5 rotated 4.3:  -0.997,0
34 = drill 0.914 pad 1.6 round:  -20.32,-1.27 | drill 0.914 pad 1.6 octagon:  -20.32,1.27;  -17.78,-1.27;  -17.78,1.27;  -15.24,-1.27;  -15.24,1.27;  -12.7,-1.27;  -12.7,1.27;  -10.16,-1.27;  -10.16,1.27;  -7.62,-1.27;  -7.62,1.27;  -5.08,-1.27;  -5.08,1.27;  -2.54,-1.27;  -2.54,1.27;  0,-1.27;  0,1.27;  2.54,-1.27;  2.54,1.27;  5.08,-1.27;  5.08,1.27;  7.62,-1.27;  7.62,1.27;  10.16,-1.27;  10.16,1.27;  12.7,-1.27;  15.24,-1.27;  17.78,-1.27;  20.32,-1.27;  12.7,1.27;  15.24,1.27;  17.78,1.27;  20.32,1.27
40 = drill 0.914 pad 1.6 round:  -24.13,-1.27 | drill 0.914 pad 1.6 octagon:  -24.13,1.27;  -21.59,-1.27;  -21.59,1.27;  -19.05,-1.27;  -19.05,1.27;  -16.51,-1.27;  -16.51,1.27;  -13.97,-1.27;  -13.97,1.27;  -11.43,-1.27;  -11.43,1.27;  -8.89,-1.27;  -8.89,1.27;  -6.35,-1.27;  -6.35,1.27;  -3.81,-1.27;  -3.81,1.27;  -1.27,-1.27;  -1.27,1.27;  1.27,-1.27;  1.27,1.27;  3.81,-1.27;  3.81,1.27;  6.35,-1.27;  6.35,1.27;  8.89,-1.27;  8.89,1.27;  11.43,1.27;  11.43,-1.27;  13.97,-1.27;  13.97,1.27;  16.51,1.27;  16.51,-1.27;  19.05,-1.27;  19.05,1.27;  21.59,1.27;  21.59,-1.27;  24.13,-1.27;  24.13,1.27
14' = drill 0.914 pad 1.6 round:  -7.62,-1.27 | drill 0.914 pad 1.6 octagon:  -7.62,1.27;  -5.08,-1.27;  -5.08,1.27;  -2.54,-1.27;  -2.54,1.27;  0,-1.27;  0,1.27;  2.54,-1.27;  2.54,1.27;  5.08,-1.27;  5.08,1.27;  7.62,-1.27;  7.62,1.27
10 = drill 0.914 pad 1.6 round:  -5.08,-1.27 | drill 0.914 pad 1.6 octagon:  -5.08,1.27;  -2.54,-1.27;  -2.54,1.27;  0,-1.27;  0,1.27;  2.54,-1.27;  2.54,1.27;  5.08,-1.27;  5.08,1.27
F102 = drill 0.6 pad 1.016 round:  -1.27,0;  0,0;  1.27,0
9H_FC = drill 1.1 pad 1.8 octagon:  5.486,1.429;  2.743,1.429;  0,1.429;  -2.743,1.429;  4.115,-1.429;  1.372,-1.429;  -1.372,-1.429;  -4.115,-1.429 | drill 1.1 pad 1.8 round:  -5.486,1.429 | drill 3.302 pad 5.08 round:  -12.522,0;  12.522,0
3H_FC = drill 1.1 pad 1.8 round:  -15.172,-1.429 | drill 1.1 pad 1.8 octagon:  -12.403,-1.429;  -9.66,-1.429;  -6.891,-1.429;  -4.123,-1.429;  -1.38,-1.429;  1.389,-1.429;  4.158,-1.429;  6.901,-1.429;  9.669,-1.429;  12.438,-1.429;  15.181,-1.429;  -13.8,1.429;  -11.032,1.429;  -8.263,1.429;  -5.52,1.429;  -2.751,1.429;  0.017,1.429;  2.761,1.429;  5.529,1.429;  8.298,1.429;  11.041,1.429;  13.81,1.429 | drill 3.302 pad 5.08 round:  -22.131,0;  22.131,0
3-1 = drill 1 pad 1.676 octagon:  -2.54,0;  0,0;  2.54,0
N-8 = drill 1.4 pad 2.184 round:  -2.54,7.223;  2.54,7.223;  -5.08,7.223;  5.08,7.223;  -5.08,-5.477;  5.08,-5.477;  7.509,-7.969;  -7.509,-7.969;  7.509,-2.969;  -7.509,-2.969;  0,-2.969;  0,-7.969
NCH-B = drill 1.5 pad 2.4 round:  0,0 | drill 2.9 pad 4.2 round:  -5.08,0;  5.08,0;  0,5.08
5H_FC = drill 1.1 pad 1.8 octagon:  16.561,1.429;  13.792,1.429;  11.049,1.429;  8.28,1.429;  5.512,1.429;  2.769,1.429;  0,1.429;  -2.769,1.429;  -5.512,1.429;  -8.28,1.429;  -11.049,1.429;  -13.792,1.429;  15.189,-1.429;  12.421,-1.429;  9.652,-1.429;  6.909,-1.429;  4.14,-1.429;  1.372,-1.429;  -1.372,-1.429;  -4.14,-1.429;  -6.909,-1.429;  -9.652,-1.429;  -12.421,-1.429;  -15.189,-1.429 | drill 1.1 pad 1.8 round:  -16.561,1.429 | drill 3.302 pad 5.08 round:  -23.52,0;  23.52,0
L-2 = drill 1 pad 1.93 octagon:  -1.27,0;  1.27,0
10' = drill 3.1 pad 3.5 round:  -3.81,0;  3.81,0 | drill 1 pad 1.676 round:  -0.635,-6.35;  -1.905,-8.89;  0.635,-8.89 | drill 1 pad 1.676 square:  1.905,-6.35
OT-100 = drill 0.9 pad 1.397 octagon:  -41.91,-2.54;  -39.37,-2.54;  -41.91,2.54;  -39.37,2.54;  -59.69,-2.54;  -57.15,-2.54;  -54.61,-2.54;  -52.07,-2.54;  -49.53,-2.54;  -62.23,2.54;  -59.69,2.54;  -57.15,2.54;  -54.61,2.54;  -52.07,2.54;  -49.53,2.54;  -46.99,-2.54;  -44.45,-2.54;  -46.99,2.54;  -44.45,2.54;  -36.83,-2.54;  -36.83,2.54;  -34.29,-2.54;  -34.29,2.54;  -31.75,-2.54;  -31.75,2.54;  -29.21,-2.54;  -29.21,2.54;  -26.67,-2.54;  -26.67,2.54;  -24.13,-2.54;  -24.13,2.54;  -21.59,-2.54;  -21.59,2.54;  -19.05,-2.54;  -19.05,2.54;  -16.51,-2.54;  -16.51,2.54;  -13.97,-2.54;  -13.97,2.54;  -11.43,-2.54;  -11.43,2.54;  -8.89,-2.54;  -8.89,2.54;  -6.35,-2.54;  -6.35,2.54;  -3.81,-2.54;  -3.81,2.54;  -1.27,-2.54;  -1.27,2.54;  1.27,-2.54;  1.27,2.54;  3.81,-2.54;  3.81,2.54;  6.35,-2.54;  6.35,2.54;  8.89,-2.54;  8.89,2.54;  11.43,-2.54;  11.43,2.54;  13.97,-2.54;  13.97,2.54;  16.51,-2.54;  16.51,2.54;  19.05,-2.54;  19.05,2.54;  21.59,-2.54;  21.59,2.54;  24.13,-2.54;  24.13,2.54;  26.67,-2.54;  26.67,2.54;  29.21,-2.54;  29.21,2.54;  31.75,-2.54;  31.75,2.54;  34.29,-2.54;  34.29,2.54;  36.83,-2.54;  36.83,2.54;  39.37,-2.54;  39.37,2.54;  41.91,-2.54;  41.91,2.54;  44.45,-2.54;  44.45,2.54;  46.99,-2.54;  46.99,2.54;  49.53,-2.54;  49.53,2.54;  52.07,-2.54;  52.07,2.54;  54.61,-2.54;  54.61,2.54;  57.15,-2.54;  57.15,2.54;  59.69,-2.54;  59.69,2.54;  62.23,-2.54;  62.23,2.54 | drill 0.9 pad 1.397 round:  -62.23,-2.54
OT-43 = smd 1.65 x 9.5 rotated 161.8:  -33.02,0 | smd 1.65 x 9.5 rotated 206.8:  -30.48,0 | smd 1.65 x 9.5 rotated 116.8:  -35.56,0 | smd 1.65 x 9.5 rotated 26.9:  -27.94,0 | smd 1.65 x 9.5 rotated 71.8:  -38.1,0 | smd 1.65 x 9.5 rotated 26.8:  -40.64,0 | smd 1.65 x 9.5 rotated 5:  -43.18,0 | smd 1.65 x 9.5 rotated 4.8:  -45.72,0 | smd 1.65 x 9.5 rotated 71.9:  -25.4,0 | smd 1.65 x 9.5 rotated 116.9:  -22.86,0 | smd 1.65 x 9.5 rotated 161.9:  -20.32,0 | smd 1.65 x 9.5 rotated 4.7:  -48.26,0 | smd 1.65 x 9.5 rotated 206.9:  -17.78,0 | smd 1.65 x 9.5 rotated 27:  -15.24,0 | smd 1.65 x 9.5 rotated 72:  -12.7,0 | smd 1.65 x 9.5 rotated 117:  -10.16,0 | smd 1.65 x 9.5 rotated 4.5:  -50.8,0 | smd 1.65 x 9.5 rotated 4.3:  -53.34,0 | smd 1.65 x 9.5 rotated 4.4 bottom:  -53.34,0;  -30.48,0 | smd 1.65 x 9.5 rotated 4.6 bottom:  -50.8,0;  -5.08,0 | smd 1.65 x 9.5 rotated 4.7 bottom:  -48.26,0;  7.62,0;  20.32,0 | smd 1.65 x 9.5 rotated 4.9 bottom:  -45.72,0;  45.72,0 | smd 1.65 x 9.5 rotated 4.3 bottom:  -43.18,0 | smd 1.65 x 9.5 rotated 49.3 bottom:  -40.64,0 | smd 1.65 x 9.5 rotated 94.3 bottom:  -38.1,0 | smd 1.65 x 9.5 rotated 139.3 bottom:  -35.56,0 | smd 1.65 x 9.5 rotated 184.3 bottom:  -33.02,0 | smd 1.65 x 9.5 rotated 49.4 bottom:  -27.94,0 | smd 1.65 x 9.5 rotated 94.4 bottom:  -25.4,0 | smd 1.65 x 9.5 rotated 139.4 bottom:  -22.86,0 | smd 1.65 x 9.5 rotated 184.4 bottom:  -20.32,0 | smd 1.65 x 9.5 rotated 4.5 bottom:  -17.78,0 | smd 1.65 x 9.5 rotated 49.5 bottom:  -15.24,0 | smd 1.65 x 9.5 rotated 94.5 bottom:  -12.7,0 | smd 1.65 x 9.5 rotated 139.5 bottom:  -10.16,0 | smd 1.65 x 9.5 rotated 162:  -7.62,0 | smd 1.65 x 9.5 rotated 184.5 bottom:  -7.62,0 | smd 1.65 x 9.5 rotated 207:  -5.08,0 | smd 1.65 x 9.5 rotated 27.1:  -2.54,0 | smd 1.65 x 9.5 rotated 49.6 bottom:  -2.54,0 | smd 1.65 x 9.5 rotated 72.1:  0,0 | smd 1.65 x 9.5 rotated 94.6 bottom:  0,0 | smd 1.65 x 9.5 rotated 117.1:  2.54,0 | smd 1.65 x 9.5 rotated 139.6 bottom:  2.54,0 | smd 1.65 x 9.5 rotated 162.1:  5.08,0 | smd 1.65 x 9.5 rotated 184.6 bottom:  5.08,0 | smd 1.65 x 9.5 rotated 207.1:  7.62,0 | smd 1.65 x 9.5 rotated 162.2:  30.48,0;  17.78,0 | smd 1.65 x 9.5 rotated 207.2:  33.02,0;  20.32,0 | smd 1.65 x 9.5 rotated 117.2:  27.94,0;  15.24,0 | smd 1.65 x 9.5 rotated 27.3:  35.56,0 | smd 1.65 x 9.5 rotated 72.2:  25.4,0;  12.7,0 | smd 1.65 x 9.5 rotated 27.2:  22.86,0;  10.16,0 | smd 1.65 x 9.5 rotated 72.3:  38.1,0 | smd 1.65 x 9.5 rotated 117.3:  40.64,0 | smd 1.65 x 9.5 rotated 162.3:  43.18,0 | smd 1.65 x 9.5 rotated 207.3:  45.72,0 | smd 1.65 x 9.5 rotated 27.4:  48.26,0 | smd 1.65 x 9.5 rotated 72.4:  50.8,0 | smd 1.65 x 9.5 rotated 117.4:  53.34,0 | smd 1.65 x 9.5 rotated 49.7 bottom:  10.16,0;  22.86,0 | smd 1.65 x 9.5 rotated 94.7 bottom:  12.7,0;  25.4,0 | smd 1.65 x 9.5 rotated 139.7 bottom:  15.24,0;  27.94,0 | smd 1.65 x 9.5 rotated 184.7 bottom:  17.78,0;  30.48,0 | smd 1.65 x 9.5 rotated 4.8 bottom:  33.02,0 | smd 1.65 x 9.5 rotated 49.8 bottom:  35.56,0 | smd 1.65 x 9.5 rotated 94.8 bottom:  38.1,0 | smd 1.65 x 9.5 rotated 139.8 bottom:  40.64,0 | smd 1.65 x 9.5 rotated 184.8 bottom:  43.18,0 | smd 1.65 x 9.5 rotated 49.9 bottom:  48.26,0 | smd 1.65 x 9.5 rotated 94.9 bottom:  50.8,0 | smd 1.65 x 9.5 rotated 139.9 bottom:  53.34,0
G-7 = drill 1.6 pad 2.4 square:  -11.88,0 | drill 1.6 pad 2.4 octagon:  -7.92,0;  -3.96,0;  0,0;  3.96,0;  7.92,0;  11.88,0
L-4 = drill 1 pad 1.93 octagon:  -3.81,0;  -1.27,0;  1.27,0;  3.81,0
22-2-2 = drill 0.7 pad 1.27 round:  -21,1 | drill 0.7 pad 1.27 octagon:  -21,-1;  -19,1;  -19,-1;  -17,1;  -17,-1;  -15,1;  -15,-1;  -13,1;  -13,-1;  -11,1;  -11,-1;  -9,1;  -9,-1;  -7,1;  -7,-1;  -5,1;  -5,-1;  -3,1;  -3,-1;  -1,1;  -1,-1;  1,1;  1,-1;  3,1;  3,-1;  5,1;  5,-1;  7,1;  7,-1;  9,1;  9,-1;  11,1;  11,-1;  13,1;  13,-1;  15,1;  15,-1;  17,1;  17,-1;  19,1;  19,-1;  21,1;  21,-1

## Placement (x,y rotation side)
BAT1  LI-3V6  [-3V6]  25.4,139.54 180 top
C1  47uF  [43]  139.54,183.04 270 top
C2  47uF  [43]  20.16,118.9 270 top
C3  100nF  [06]  72.87,106.2 0 bottom
C4  100nF  [06]  60.33,106.36 0 bottom
C5  100nF  [06]  35.08,106.2 0 bottom
C6  100nF  [06]  47.78,106.2 0 bottom
C7  100nF  [06]  49.53,80.01 0 bottom
C8  100nF  [06]  129.38,123.19 270 top
C9  100nF  [06]  72.39,78.9 0 bottom
C10  100nF  [06]  121.29,123.19 270 top
C11  100nF  [06]  35.08,78.11 0 bottom
C12  100nF  [06]  118.27,123.19 270 top
C13  100nF  [06]  22.07,98.9 0 bottom
C14  100nF  [06]  59.53,78.58 0 bottom
C15  100nF  [06]  82.39,115.25 180 bottom
C16  100nF  [06]  52.23,115.09 180 bottom
C17  100nF  [06]  107.47,123.19 270 top
C18  100uF  [43]  128.43,118.11 0 top
C19  47uF  [43]  117.32,118.11 0 top
C20  100uF  [43]  106.68,118.11 0 top
C21  100nF  [06]  142.72,123.98 270 top
C22  100nF  [06]  145.26,123.98 270 top
C23  100nF  [06]  155.73,123.98 270 top
C24  100nF  [06]  158.27,123.98 270 top
C25  100nF  [06]  244.16,128.11 180 bottom
C26  100nF  [06]  297.34,25.4 180 bottom
C27  100nF  [06]  230.66,25.4 180 bottom
C28  100nF  [06]  254.95,25.4 180 bottom
C29  100nF  [06]  279.24,25.4 180 bottom
C30  100nF  [06]  302.26,14.92 270 top
C31  100nF  [06]  104.14,167.96 90 bottom
C32  100nF  [06]  75.88,168.28 90 bottom
C33  100nF  [06]  75.88,149.22 90 bottom
C34  100nF  [06]  107.79,181.61 0 bottom
C35  100nF  [06]  95.25,181.61 180 bottom
C36  100pF  [06]  324.17,34.92 90 top
C37  100pF  [06]  326.87,30.16 270 top
C38  100pF  [06]  326.87,21.91 270 top
C39  100pF  [06]  324.17,74.93 90 top
C40  100pF  [06]  327.03,73.34 90 top
C41  100pF  [06]  326.07,65.09 90 top
C42  220uF  [43]  52.39,293.69 90 top
C43  220uF  [43]  105.25,293.85 90 top
C44  1uF  [06]  110.33,281.94 0 top
C45  220uF  [43]  17.38,239.95 270 top
C46  220uF  [43]  17.46,287.5 270 top
C47  1uF  [06]  17.14,224 180 top
C48  1nF  [06]  18.57,160.66 180 top
C49  1nF  [06]  18.57,163.19 180 top
C50  100nF  [06]  18.57,153.04 0 top
C51  39pF  [06]  18.57,168.28 180 top
C52  100nF  [06]  18.57,170.81 180 top
C53  100nF  [06]  33.34,154.31 90 top
C54  100nF  [06]  18.57,173.35 0 top
C55  10uF  [43]  20.8,180.5 0 top
C56  100pF  [06]  43.66,163.51 180 top
C57  100pF  [06]  43.66,166.05 180 top
C58  100pF  [06]  43.66,171.13 180 top
C59  1-5pF  [TRIM-1]  36.91,167.16 90 top
C60  100nF  [06]  85.25,275.75 90 bottom
C61  100nF  [06]  110.49,275.75 90 bottom
C62  100nF  [06]  43.97,267.65 180 bottom
C63  100nF  [06]  43.97,258.76 180 bottom
C64  100nF  [06]  55.88,175.1 90 bottom
C65  100nF  [06]  70.8,177.64 90 bottom
C66  100nF  [06]  47.47,203.52 180 bottom
C67  100nF  [06]  68.58,204.63 0 bottom
C68  100nF  [06]  60.17,204.63 180 bottom
C69  100nF  [06]  20.32,200.34 270 bottom
C70  100nF  [06]  26.67,220.98 0 bottom
C71  100nF  [06]  40.64,220.98 0 bottom
C72  100nF  [06]  68.58,220.98 0 bottom
C73  100nF  [06]  54.61,220.98 0 bottom
C74  47uF  [43]  68.58,253.05 270 top
C75  7,5pF  [06]  33.34,161.93 90 top
C76  47uF  [43]  18.57,210.03 270 top
C77  10uF  [43]  54.45,133.19 0 top
C78  100nF  [06]  65.72,133.83 270 top
C79  20pF  [06]  63.18,133.83 270 top
C80  5-40pF  [TRIM-1]  68.74,127.95 0 top
C81  6,8nF  [06]  125.73,289.08 90 top
C82  3,9nF  [06]  131.45,289.08 90 top
C83  10uF  [12]  122.08,290.51 270 top
C84  100nF  [06]  125.73,274.95 0 top
C85  6,8nF  [06]  140.97,289.08 90 top
C86  10uF  [12]  144.62,290.51 270 top
C87  3,9nF  [06]  135.26,289.08 90 top
C88  100nF  [06]  140.97,274.95 180 top
C89  10uF  [43]  133.35,268.45 180 top
C90  47nF  [06]  95.25,227.65 90 bottom
C91  47nF  [06]  97.79,227.65 90 bottom
C92  47nF  [06]  102.87,227.65 90 bottom
C93  47nF  [06]  105.41,227.65 90 bottom
C94  22uF  [43]  119.7,281.94 90 top
C95  22uF  [43]  119.7,270.35 90 top
C96  100nF  [06]  115.57,284.32 90 top
C97  100nF  [06]  115.57,268.13 90 top
C98  10nF  [06]  114.94,295.12 270 top
C99  100nF  [06]  135.89,273.53 270 top
C100  100pF  [06]  334.49,292.58 270 top
C101  100pF  [06]  329.09,287.18 270 top
C102  100pF  [06]  326.39,287.18 270 top
C103  100nF  [06]  272.42,258.92 180 top
C104  10uF  [43]  285.59,279.08 0 top
C105  10uF  [43]  274,279.08 0 top
C106  100nF  [06]  81.28,181.61 0 bottom
C107  100nF  [06]  123.19,181.61 180 bottom
C108  100nF  [06]  172.72,179.55 0 bottom
C109  100nF  [06]  172.72,164.78 0 bottom
C110  100nF  [06]  228.28,43.34 270 bottom
C111  100nF  [06]  252.57,43.34 270 bottom
C112  100nF  [06]  248.76,170.02 180 bottom
C113  47uF  [43]  156.53,246.54 270 top
C114  47uF  [43]  317.82,140.02 180 top
C115  100nF  [06]  257.33,61.6 90 bottom
C116  100nF  [06]  276.86,61.59 270 bottom
C117  100nF  [06]  270.67,12.38 90 top
C118  100nF  [06]  255.75,7.94 90 top
C119  100nF  [06]  301.15,61.59 270 bottom
C120  100nF  [06]  214.63,83.66 180 bottom
C121  100nF  [06]  301.15,43.34 270 bottom
C122  100nF  [06]  208.6,68.1 0 bottom
C123  100nF  [06]  276.86,43.34 270 bottom
C124  47uF  [43]  283.53,189.07 180 top
C125  100nF  [06]  301.15,79.85 270 bottom
C126  100nF  [06]  276.86,79.85 270 bottom
C127  100nF  [06]  252.57,79.85 270 bottom
C128  100nF  [06]  231.46,79.69 180 bottom
C129  47uF  [43]  316.87,268.61 270 top
C130  100nF  [06]  228.44,61.91 270 bottom
C131  100nF  [06]  237.65,126.05 90 bottom
C132  100nF  [06]  240.67,163.35 0 bottom
C133  100nF  [06]  282.89,123.98 0 bottom
C134  100nF  [06]  282.89,119.54 0 bottom
C135  100nF  [06]  306.07,177.8 0 bottom
C136  100nF  [06]  294.64,177.8 0 bottom
C137  100nF  [06]  283.37,177.8 0 bottom
C138  100nF  [06]  273.53,176.53 270 bottom
C139  100nF  [06]  282.1,226.22 270 bottom
C140  100nF  [06]  282.42,248.29 180 top
C141  100nF  [06]  231.62,209.23 270 top
C142  100nF  [06]  314.32,280.99 0 bottom
C143  100nF  [06]  280.19,269.24 180 bottom
C144  100nF  [06]  229.71,233.68 270 top
C145  100nF  [06]  250.83,233.68 270 top
C146  100nF  [06]  169.86,289.88 180 bottom
C147  100nF  [06]  149.86,276.7 180 bottom
C148  100nF  [06]  207.8,284.96 0 bottom
C149  100nF  [06]  257.81,261.62 0 bottom
C150  100nF  [06]  120.49,245.27 0 bottom
C151  100nF  [06]  82.55,230.51 90 bottom
C152  100nF  [06]  82.55,214.47 90 bottom
C153  100nF  [06]  167.32,255.11 0 bottom
C154  100nF  [06]  177.64,255.11 0 bottom
C155  100nF  [06]  182.56,228.44 180 bottom
C156  100nF  [06]  172.24,228.44 180 bottom
C157  100nF  [06]  173.99,129.22 180 bottom
C158  100nF  [06]  206.69,104.3 0 bottom
C159  100nF  [06]  191.45,285.12 180 bottom
C160  100nF  [06]  191.45,291.94 180 bottom
C161  47uF  [43]  88.11,119.22 270 top
C162  47uF  [43]  313.06,229.41 270 top
C163  47uF  [43]  182.72,34.92 270 top
C164  4,7uF  [28]  256.06,14.45 270 top
C165  100nF  [06]  173.51,147.32 270 top
D1  BAS32L  [D-80]  48.26,133.51 90 top
D2  BAS32L  [D-80]  45.72,133.51 90 top
D3  BAS32L  [D-80]  272.1,275.43 0 top
IC1  74HC573  [P20]  167,243.68 270 top
IC2  74HC573  [P20]  167,214.95 270 top
IC3  74HC541  [P20]  177.01,243.68 270 top
IC4  74HC541  [P20]  177.01,214.95 270 top
IC5  74HC541  [P20]  87.63,160.66 0 top
IC6  74HC541  [P20]  115.57,160.66 0 top
IC7  514400  [J26/20]  80.33,183.04 270 top
IC8  514400  [J26/20]  94.62,183.04 270 top
IC9  514400  [J26/20]  108.59,183.04 270 top
IC10  514400  [J26/20]  123.19,183.04 270 top
IC11  QUARZ  [DIL14]  173.99,131.92 0 top
IC12  27C400  [P40-6]  282.1,237.65 180 top
IC13  27C4096  [P40-6]  282.1,214.79 180 top
IC14  GAL16V8-15  [P20]  218.28,241.46 180 top
IC15  74LS373  [P20]  47.31,66.68 270 top
IC16  74F521  [P20]  34.77,66.68 270 top
IC17  74LS245  [P20]  72.39,94.93 270 top
IC18  GAL16V8-15  [P20]  47.31,94.93 270 top
IC19  GAL16V8-25  [P20]  37.31,118.9 180 top
IC20  AMBER  [CC68]  41.12,264.16 90 top
IC21  VIDEO_H  [P22]  11.91,267.65 90 top
IC22  74HC157  [P16]  289.72,9.52 180 top
IC23  74HC245  [P20]  98.74,275.75 180 top
IC24  74HC245  [P20]  71.12,275.75 180 top
IC25  VIDEO_H  [P22]  76.52,285.75 180 top
IC26  DENISE  [P48-6]  107.95,250.83 180 top
IC27  NE564  [P16]  26.67,161.92 270 top
IC28  74HC04  [P14]  52.07,163.51 270 top
IC29  74F163  [P16]  66.99,164.78 270 top
IC30  74F74  [P14]  26.67,194.31 270 top
IC31  GAL16V8-25  [P20]  34.77,94.93 270 top
IC32  GAL16V8-25  [P20]  59.85,94.93 270 top
IC33  GAL16V8-15  [P20]  67.47,119.06 180 top
IC34  27C256  [P28-6]  18.26,82.23 270 top
IC35  74LS245  [P20]  59.85,66.68 270 top
IC36  74LS245  [P20]  72.39,66.67 270 top
IC37  MC68030RC  [A-128]  241.93,124.46 270 top
IC38  MC68881RC  [A-68]  284.32,120.65 180 top
IC39  MSM6242  [P18]  55.56,141.6 180 top
IC40  CIA_8520  [P40-6]  239.55,261.3 180 top
IC41  PAULA  [P48-6]  107.95,231.46 180 top
IC42  TL084  [P14]  133.35,281.3 180 top
IC43  CIA_8520  [P40-6]  172.4,271.3 180 top
IC44  DS1488  [P14]  180.82,286.07 180 top
IC45  DS1489  [P14]  158.12,286.07 180 top
IC46  74HC32  [P14]  243.21,241.46 180 top
IC47  7406  [P14]  201.45,286.07 180 top
IC48  LM339  [P14]  280.19,266.54 270 top
IC49  7407  [P14]  307.98,282.1 180 top
IC50  GARY  [P48-6]  107.95,212.09 180 top
IC51  74F04  [P14]  83.82,141.6 0 top
IC52  AGNU8375  [CC84]  171.77,171.61 0 top
IC53  GAL20V8-15  [P24-3]  271.78,163.83 270 top
IC54  GAL20V8-15  [P24-3]  283.21,163.83 270 top
IC55  GAL20V8-15  [P24-3]  294.64,163.83 270 top
IC56  GAL20V8-15  [P24-3]  306.07,163.83 270 top
IC57  LSI1024  [CC68]  244.48,163.83 0 top
IC58  74F245  [20L]  206.85,77.15 270 top
IC59  74F245  [20L]  206.85,61.59 270 top
IC60  29F800  [OP48]  240.19,218.12 90 top
IC61  QUARZ  [DIL14]  207.01,99.22 270 top
IC62  CY7C1049  [J36/4]  303.53,34.13 180 top
IC63  CY7C1049  [J36/4]  279.24,34.13 180 top
IC64  CY7C1049  [J36/4]  254.95,34.13 180 top
IC65  CY7C1049  [J36/4]  230.66,34.13 180 top
IC66  CY7C1049  [J36/4]  303.53,70.64 180 top
IC67  CY7C1049  [J36/4]  279.24,70.64 180 top
IC68  CY7C1049  [J36/4]  254.95,70.64 180 top
IC69  CY7C1049  [J36/4]  230.66,70.64 180 top
IC70  CY7C1049  [J36/4]  303.53,52.39 180 top
IC71  CY7C1049  [J36/4]  279.24,52.39 180 top
IC72  CY7C1049  [J36/4]  254.95,52.39 180 top
IC73  CY7C1049  [J36/4]  230.66,52.39 180 top
IC74  CY7C1049  [J36/4]  303.53,88.9 180 top
IC75  CY7C1049  [J36/4]  279.24,88.9 180 top
IC76  CY7C1049  [J36/4]  254.95,88.9 180 top
IC77  CY7C1049  [J36/4]  230.66,88.9 180 top
IC78  74AC74  [14]  216.69,91.28 270 bottom
IC79  74HC05  [P14]  244.16,10.16 180 top
IC80  74AC08  [14]  179.55,147.32 0 top
L1  FB  [06]  320.36,19.53 180 top
L2  FB  [06]  320.36,24.92 180 top
L3  FB  [06]  320.36,27.62 180 top
L4  FB  [06]  320.36,30.32 180 top
L5  FB  [06]  320.36,59.53 180 top
L6  FB  [06]  320.36,64.93 180 top
L7  FB  [06]  320.36,67.63 180 top
L8  FB  [06]  320.36,70.33 180 top
L9  FB  [06]  320.36,22.22 0 top
L10  FB  [06]  320.36,33.02 0 top
L11  FB  [06]  320.36,35.72 0 top
L12  FB  [06]  320.36,62.23 0 top
L13  FB  [06]  320.36,73.03 0 top
L14  FB  [06]  320.36,75.72 0 top
L15  FB  [06]  324.01,56.52 0 top
L16  FB  [06]  99.54,296.39 270 top
L17  FB  [06]  79.22,296.39 90 top
L18  FB  [06]  71.6,296.39 90 top
L19  FB  [06]  66.52,296.39 90 top
L20  FB  [06]  97,296.39 270 top
L21  FB  [06]  94.46,296.39 270 top
L22  FB  [06]  91.92,296.39 270 top
L23  FB  [06]  76.68,296.39 270 top
L24  10UH  [10UH]  110.65,287.5 90 top
L25  FB  [06]  105.09,281.94 180 top
L26  10uH  [10UH]  16.99,230.03 270 top
L27  FB  [06]  21.59,295.59 270 top
L28  FB  [06]  24.13,295.59 270 top
L29  FB  [06]  26.67,295.59 270 top
L30  FB  [06]  45.72,293.37 180 top
L31  FB  [06]  39.69,293.37 180 top
L32  FB  [06]  17.14,221.14 0 top
L33  FB  [06]  38.74,244.47 270 top
L34  FB  [06]  50.17,176.53 90 top
L35  FB  [06]  58.42,165.89 270 top
L36  FB  [06]  63.5,178.91 270 top
L37  FB  [06]  261.46,296.39 270 top
L38  FB  [06]  15.95,302.5 0 top
L39  FB  [06]  139.86,302.74 0 top
L40  FB  [06]  118.59,302.74 0 top
L41  FB  [06]  125.73,269.56 180 top
L42  FB  [06]  140.97,267.02 0 top
L43  FB  [06]  127.16,265.59 270 top
L44  FB  [06]  311.94,296.39 270 top
L45  FB  [06]  309.25,296.39 270 top
L46  FB  [06]  306.55,296.39 270 top
L47  FB  [06]  303.85,296.39 270 top
L48  FB  [06]  301.15,296.39 270 top
L49  FB  [06]  298.45,296.39 270 top
L50  FB  [06]  295.75,296.39 270 top
L51  FB  [06]  293.05,296.39 270 top
L52  FB  [06]  290.35,296.39 270 top
L53  FB  [06]  287.66,296.39 270 top
L54  FB  [06]  282.26,296.39 270 top
L55  FB  [06]  279.56,296.39 270 top
L56  FB  [06]  274.16,296.39 270 top
L57  FB  [06]  284.96,296.39 90 top
L58  FB  [06]  164.78,296.39 270 top
L59  FB  [06]  167.48,296.39 270 top
L60  FB  [06]  170.18,296.39 270 top
L61  FB  [06]  175.58,296.39 270 top
L62  FB  [06]  180.98,296.39 270 top
L63  FB  [06]  186.37,296.39 270 top
L64  FB  [06]  162.08,296.39 90 top
L65  FB  [06]  172.88,296.39 90 top
L66  FB  [06]  178.28,296.39 90 top
L67  FB  [06]  189.07,296.39 90 top
L68  FB  [06]  191.77,296.39 90 top
L69  FB  [06]  194.47,296.39 90 top
L70  FB  [06]  197.17,296.39 90 top
L71  FB  [06]  183.67,296.39 90 top
L72  FB  [06]  276.86,296.39 90 top
L73  FB  [06]  256.06,296.39 270 top
L74  FB  [06]  250.67,296.39 270 top
L75  FB  [06]  245.27,296.39 270 top
L76  FB  [06]  239.87,296.39 270 top
L77  FB  [06]  220.98,296.39 270 top
L78  FB  [06]  215.58,296.39 270 top
L79  FB  [06]  258.76,296.39 90 top
L80  FB  [06]  253.37,296.39 90 top
L81  FB  [06]  247.97,296.39 90 top
L82  FB  [06]  242.57,296.39 90 top
L83  FB  [06]  237.17,296.39 90 top
L84  FB  [06]  234.47,296.39 90 top
L85  FB  [06]  231.78,296.39 90 top
L86  FB  [06]  229.08,296.39 90 top
L87  FB  [06]  226.38,296.39 90 top
L88  FB  [06]  223.68,296.39 90 top
L89  FB  [06]  218.28,296.39 90 top
L90  48 OHM/6A  [06]  331.79,292.58 270 top
L91  FB  [06]  331.79,287.18 270 top
L92  FB  [06]  334.49,287.18 270 top
L93  FB  [06]  170.18,141.61 270 top
L94  FB  [06]  110.17,123.19 90 top
L95  FB  [06]  112.87,123.19 90 top
L96  FB  [06]  115.57,123.19 90 top
L97  FB  [06]  123.98,123.19 90 top
L98  FB  [06]  126.68,123.19 90 top
L99  FB  [06]  132.08,123.19 90 top
L100  48 OHM/6A  [06]  147.8,123.98 90 top
L101  48 OHM/6A  [06]  140.18,123.98 90 top
L102  48 OHM/6A  [06]  160.81,123.98 90 top
L103  48 OHM/6A  [06]  153.19,123.98 90 top
L104  L-1206  [06]  5.08,249.71 180 top
Q1  32kHz  [UHR]  60.64,128.43 180 top
R1  22R  [04]  124.94,201.93 0 top
R2  22R  [04]  133.19,202.09 180 top
R3  22R  [04]  167.16,163.35 90 bottom
R4  68R  [04]  83.82,168.59 270 top
R5  4k7  [04]  58.58,296.39 270 top
R6  33R  [04]  44.13,244.47 270 top
R7  68R  [04]  81.28,168.59 270 top
R8  68R  [04]  86.36,168.59 270 top
R9  68R  [04]  88.9,168.59 270 top
R10  68R  [04]  91.44,168.59 270 top
R11  68R  [04]  93.98,168.59 270 top
R12  33R  [04]  41.43,244.47 270 top
R13  68R  [04]  96.52,168.59 270 top
R14  33R  [04]  30.64,244.48 270 top
R15  68R  [04]  99.06,168.59 270 top
R16  68R  [04]  109.22,168.59 270 top
R17  33R  [04]  33.34,244.48 270 top
R18  68R  [04]  111.76,168.59 270 top
R19  33R  [04]  36.04,244.47 270 top
R20  68R  [04]  114.3,168.59 270 top
R21  1K  [04]  18.57,155.57 0 top
R22  1K  [04]  18.57,165.74 180 top
R23  90R9  [04]  41.12,156.53 90 top
R24  1R  [04]  18.57,175.9 0 top
R25  47K5  [04]  29.05,180.34 270 top
R26  1k  [POT-G]  41.91,175.74 0 top
R27  10R  [04]  43.66,168.59 0 top
R28  1K  [04]  60.48,160.02 90 top
R29  150R  [04]  10.56,302.5 180 top
R30  10k  [04]  63.98,148.27 180 top
R31  1k  [04]  43.34,133.51 90 top
R32  5M6  [04]  60.64,133.83 270 top
R33  10k  [04]  128.27,289.08 90 top
R34  10k  [04]  125.73,294.64 90 top
R35  1k  [04]  144.62,296.54 270 top
R36  3K32  [04]  43.66,160.97 0 top
R37  390R  [04]  145.1,302.74 180 top
R38  1K  [04]  18.57,158.12 180 top
R39  470R  [04]  43.82,156.53 90 top
R40  390R  [04]  125.73,272.26 0 top
R41  470k  [04]  132.08,294.64 270 top
R42  10k  [04]  138.43,289.08 90 top
R43  10k  [04]  140.97,294.64 90 top
R44  1k  [04]  122.08,296.55 270 top
R45  390R  [04]  123.98,302.74 180 top
R46  390R  [04]  140.97,272.26 180 top
R47  470k  [04]  134.62,294.64 270 top
R48  1k  [04]  130.81,273.53 90 top
R49  1k  [04]  133.35,273.53 270 top
R50  10R  [04]  115.57,278.92 270 top
R51  10R  [04]  115.57,273.53 90 top
R52  10k  [04]  140.97,269.56 0 top
R53  10k  [04]  112.08,295.12 270 top
R54  2k7  [04]  118.27,289.72 90 top
R55  330R  [04]  8.41,61.59 90 top
R56  10k  [04]  115.41,289.72 270 top
R57  680R  [04]  8.41,56.36 270 top
R58  100R  [04]  329.09,292.58 270 top
R59  100R  [04]  326.39,292.58 270 top
R60  1k  [04]  272.42,261.46 180 top
R61  1k  [04]  272.42,264 0 top
R62  22k  [04]  272.26,270.19 0 top
R63  100k  [04]  272.26,272.73 0 top
R64  10k  [04]  287.81,266.54 180 top
R65  1M  [04]  287.81,269.08 0 top
R66  1k  [04]  287.81,274.16 180 top
R67  4k7  [04]  287.81,271.62 180 top
R68  22R  [04]  97.95,143.35 180 top
R69  22R  [04]  97.95,140.65 180 top
R70  22R  [04]  97.95,137.95 180 top
R71  68R  [04]  116.84,168.59 270 top
R72  68R  [04]  119.38,168.59 270 top
R73  68R  [04]  121.92,168.59 270 top
R76  4k7  [04]  248.6,192.72 0 top
R77  4k7  [04]  255.91,192.72 180 top
R78  4k7  [04]  61.44,296.39 270 top
R79  4k7  [04]  95.41,199.07 270 top
R80  4k7  [04]  327.82,283.05 0 top
R81  4k7  [04]  333.38,283.05 180 top
R82  470R  [04]  162.4,163.35 270 bottom
R83  33R  [04]  17.15,246.06 0 top
R84  33R  [04]  17.15,248.6 0 top
R85  33R  [04]  17.15,251.14 0 top
R86  33R  [04]  17.15,253.68 0 top
R87  33R  [04]  17.15,258.76 0 top
R88  33R  [04]  17.15,261.3 0 top
R89  33R  [04]  17.15,263.84 0 top
R90  33R  [04]  17.15,266.38 0 top
R91  33R  [04]  17.15,271.46 0 top
R92  33R  [04]  17.15,274 0 top
R93  33R  [04]  17.15,276.54 0 top
R94  33R  [04]  17.15,279.08 0 top
R95  47R  [04]  89.38,296.39 270 top
R96  47R  [04]  86.84,296.39 270 top
R97  47R  [04]  84.3,296.39 270 top
R98  47R  [04]  81.76,296.39 270 top
R99  47R  [04]  74.14,296.39 270 top
R100  47R  [04]  69.06,296.39 270 top
R101  47R  [04]  63.98,296.39 270 top
R102  47R  [04]  102.08,296.39 270 top
R103  4K7  [04]  88.42,110.81 270 top
R104  4K7  [04]  38.1,126.52 180 top
R105  4K7  [04]  67.47,111.13 90 top
R106  180R  [04]  18.57,37.78 90 top
R107  2K2  [04]  59.85,83.18 180 bottom
R108  4k7  [04]  246.54,102.55 0 bottom
R109  4k7  [04]  244.95,119.86 180 bottom
R110  1k  [04]  280.51,115.57 270 bottom
R111  1k  [04]  283.05,115.57 270 bottom
R112  4k7  [04]  315.44,291.78 0 top
R113  4k7  [04]  307.18,174.31 270 bottom
R114  4k7  [04]  285.59,289.88 270 top
R115  2k21  [04]  282.89,126.52 0 bottom
R116  33R2  [04]  241.62,156.45 0 bottom
R117  33R2  [04]  241.62,159.15 0 bottom
R118  1k  [04]  239.24,119.86 180 bottom
R119  4k7  [04]  238.44,185.9 180 top
R120  4k7  [04]  300.36,145.89 0 top
R121  332R  [04]  227.89,158.12 90 bottom
R122  33R2  [04]  214.47,87.63 0 top
R123  1k  [04]  244.95,117 180 bottom
R124  4k7  [04]  236.86,182.56 180 top
R125  4k7  [04]  322.1,90.49 0 top
R126  4k7  [04]  322.1,93.03 0 top
R127  4k7  [04]  322.1,87.95 0 top
R128  10k  [04]  53.66,48.58 0 top
R129  10k  [04]  185.74,134.14 270 top
R130  4k7  [04]  282.26,289.88 270 top
R131  4k7  [04]  279.56,289.88 270 top
R132  4k7  [04]  274.16,289.88 270 top
R133  825k  [04]  249.24,16.35 0 top
R134  4k7  [04]  243.21,16.35 180 top
R135  R-MELF  [04]  214.47,85.41 180 top
R136  R-MELF  [04]  47.94,45.09 0 top
R137  n.b.  [04]  130.02,301.47 90 top
R138  n.b.  [04]  133.19,301.47 270 top
RN1  4k7  [L9]  289.72,3.49 180 top
RN2  10k  [L5]  50.48,50.96 180 top
RN3  1k  [L5]  36.51,50.96 180 top
RN4  68R  [L8]  289.72,16.03 180 top
RN5  n.b.  [L5]  276.07,10.16 90 top
RN9  1k  [L9]  248.44,271.3 180 top
RN10  4k7  [L5]  311.31,288.92 180 top
RN12  4k7  [L9]  219.55,247.97 180 top
RN13  4k7  [L5]  211.93,234.87 180 top
RN14  470R  [L9]  325.44,205.58 90 top
RN15  4k7  [L9]  327.98,192.88 270 top
RN16  4k7  [L9]  327.98,220.82 90 top
S1  JUM-BR  [MPER]  22.86,244.32 90 top
S2  JUM-BR  [UECK-S]  32.23,126.52 0 top
S3  JUM-BR  [UECK-S]  47.94,47.94 180 top
S4  SMD-BR  [UECKE]  245.75,183.83 270 top
S5  JUM-BR  [MPER]  241.62,195.26 180 top
S6  JUM-BR  [MPER]  235.11,195.26 0 top
S7  JUM-BR  [UECK-S]  185.74,140.18 90 top
S8  SMD-BR  [UECKE]  243.68,183.83 270 top
SV1  DISK_INT  [34]  237.65,286.54 180 top
SV2  ML40  [40]  82.71,80.65 90 top
SV3  ML14  [14']  33.02,287.5 0 top
SV4  ML10  [10]  4.76,261.3 90 top
T1  MPF102  [F102]  129.38,294.64 90 top
T2  MPF102  [F102]  138.27,294.64 90 top
T3  2N3906  [F102]  118.59,294.96 90 top
U470  MSM514221  [P16]  40.64,193.04 270 top
U471  MSM514221  [P16]  54.61,193.04 270 top
U472  MSM514221  [P16]  68.58,193.04 270 top
U473  UPD42101  [P24-3]  40.64,222.25 270 top
U474  UPD42101  [P24-3]  54.61,222.25 270 top
U475  UPD42101  [P24-3]  26.67,222.25 270 top
U479  UPD42101  [P24-3]  68.58,222.25 270 top
U$2  []  213.74,3.47 0 top
U$3  []  239.38,10.22 0 bottom
U$4  [LO-2]  -0.16,314.17 0 top
U$5  [LO-2]  340.84,314.17 270 top
U$7  [LO-2]  340.84,-0.16 180 top
U$9  [LO-2]  -0.16,-0.16 90 top
X1  Mouse  [9H_FC]  332.26,27.64 90 top
X2  Game  [9H_FC]  332.26,67.64 90 top
X3  RGB  [3H_FC]  83.25,304.16 180 top
X4  J1  [3-1]  326.23,90.49 270 top
X5  DIN-8  [N-8]  38.89,304.48 0 top
X6  COMP  [NCH-B]  12.3,306.78 0 top
X7  SL3-1  [3-1]  26.51,175.9 0 top
X8  SL3-1  [3-1]  131.6,308.77 90 top
X9  RIGHT  [NCH-B]  141.76,306.78 0 top
X10  LEFT  [NCH-B]  121.44,306.78 0 top
X11  PRINTER  [5H_FC]  295.78,304.17 180 top
X12  RS232  [5H_FC]  181.48,304.16 0 top
X13  PLED  [L-2]  14.92,53.82 90 top
X14  DISK  [3H_FC]  238.35,304.17 0 top
X15  KEYBOARD  [10']  332.34,305.36 0 top
X16  J2  [3-1]  217.96,271.78 180 top
X18  ZORRO-II  [OT-100]  198.6,194.47 90 top
X19  FRONT  [OT-43]  106.6,7.54 0 top
X20  EXPANSION  [OT-43]  339.41,185.34 90 top
X21  ROM  [3-1]  252.25,195.42 0 top
X22  PSG-7  [G-7]  119.7,130.65 180 top
X23  MOL-4  [L-4]  143.99,130.02 0 top
X24  MOL-4  [L-4]  157,130.02 0 top
X25  SL22-2-2  [22-2-2]  90.65,83.03 90 top
X26  MOL-2  [L-2]  14.92,46.99 90 top

## Library data of the parts
BAT1 = BATTERY
C1-C58 C60-C79 C81-C165 D1-D3 L1-L104 R1-R25 R27-R73 R76-R138 = SMD
C59 C80 R26 = RCD
IC1-IC6 IC11-IC27 IC31-IC36 IC39-IC57 IC61 IC79 Q1 U470-U475 U479 = DIL-IC
IC7-IC10 IC60 IC62-IC77 = SMD-IC
IC28 IC58 IC59 IC78 IC80 = 74XXSMD
IC29 IC30 = 74XX
IC37 IC38 = M68000
RN1-RN5 RN9 RN10 RN12-RN16 = R-SIL
S1-S8 X4-X10 X13 X15 X16 X18-X26 = Stecker
SV1-SV4 = Flachban
T1-T3 = Transist
U$2-U$5 U$7 U$9 = MARKS
X1-X3 X11 X12 X14 = SUBD-A